# Altium PCB IMX6WBED.PcbDoc (part 1 of 10)
Units mil, origin at the board's own origin, x right, y up, seen from the top; angles counter-clockwise.
Board outline 3318.23 x 4815.16 mil, 6 copper layers (Top Layer, L2_GND_1, L3_INT_1, L6_INT_2, L7_PWR_2, Bottom Layer), stack 27.7 mil thick; 504 components, 400 nets, 2357 pads, 1199 vias.
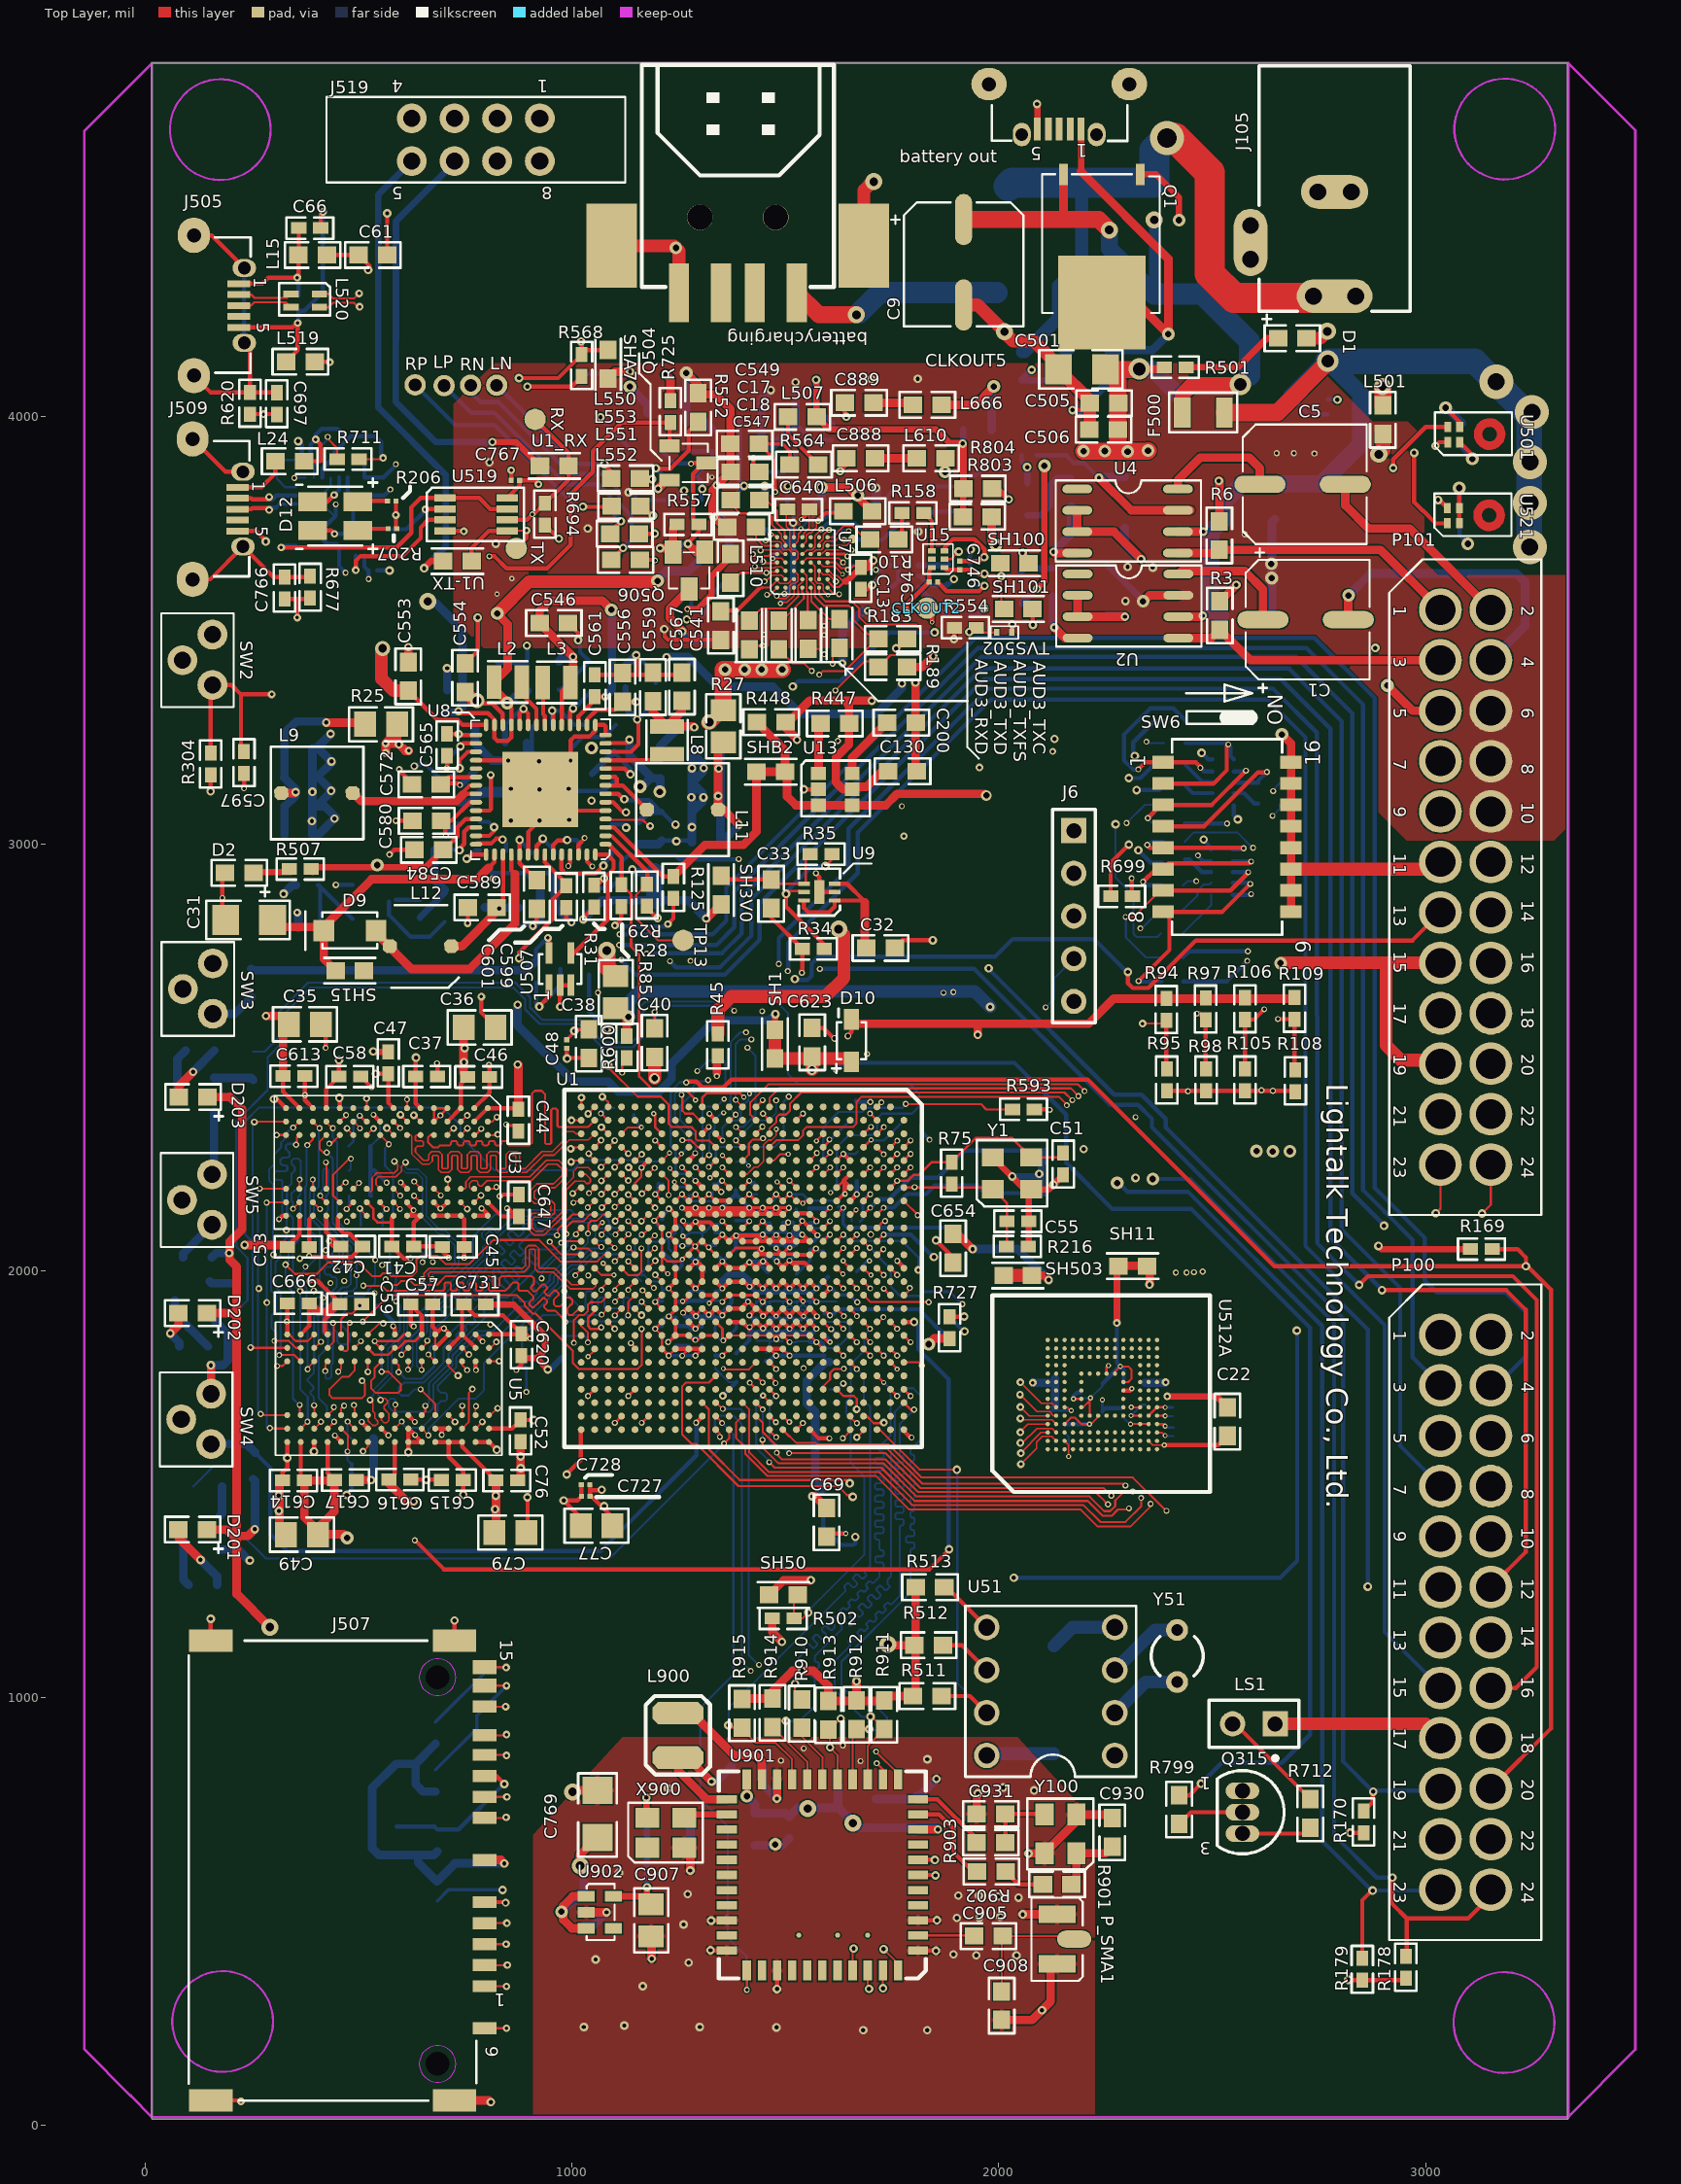
[diagram p0: Top Layer view]
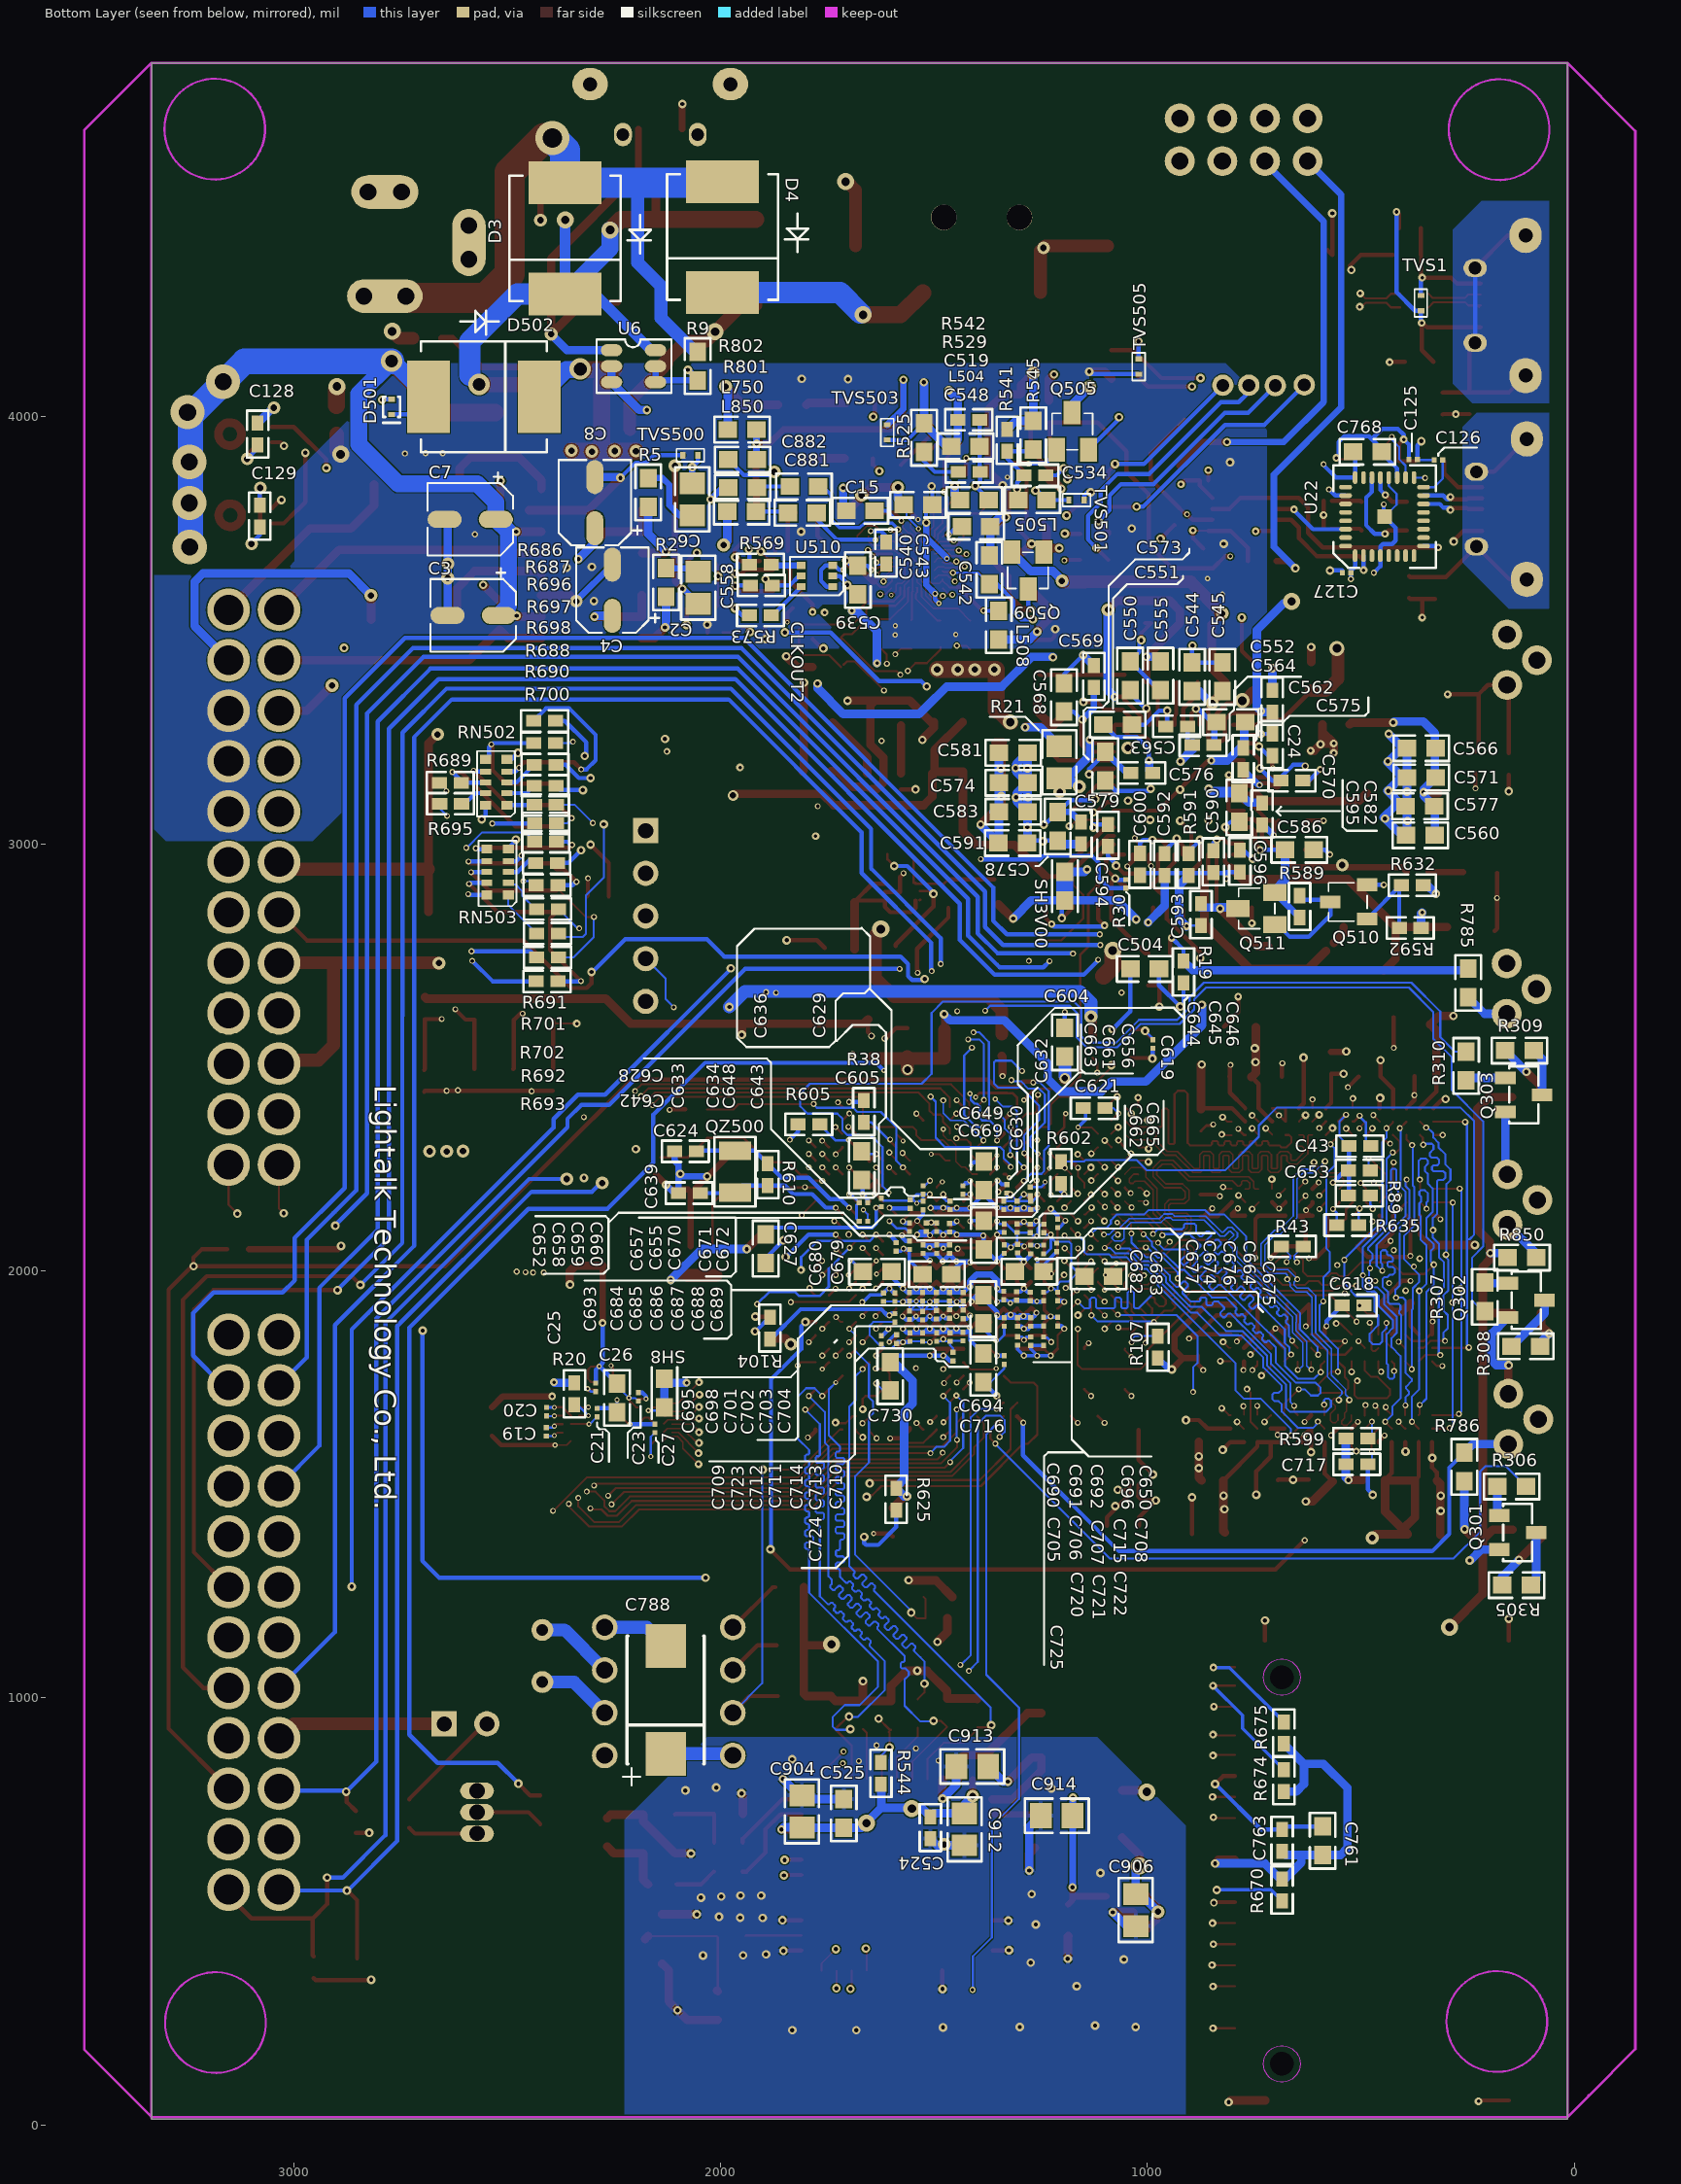
[diagram p1: Bottom Layer view, seen from below]
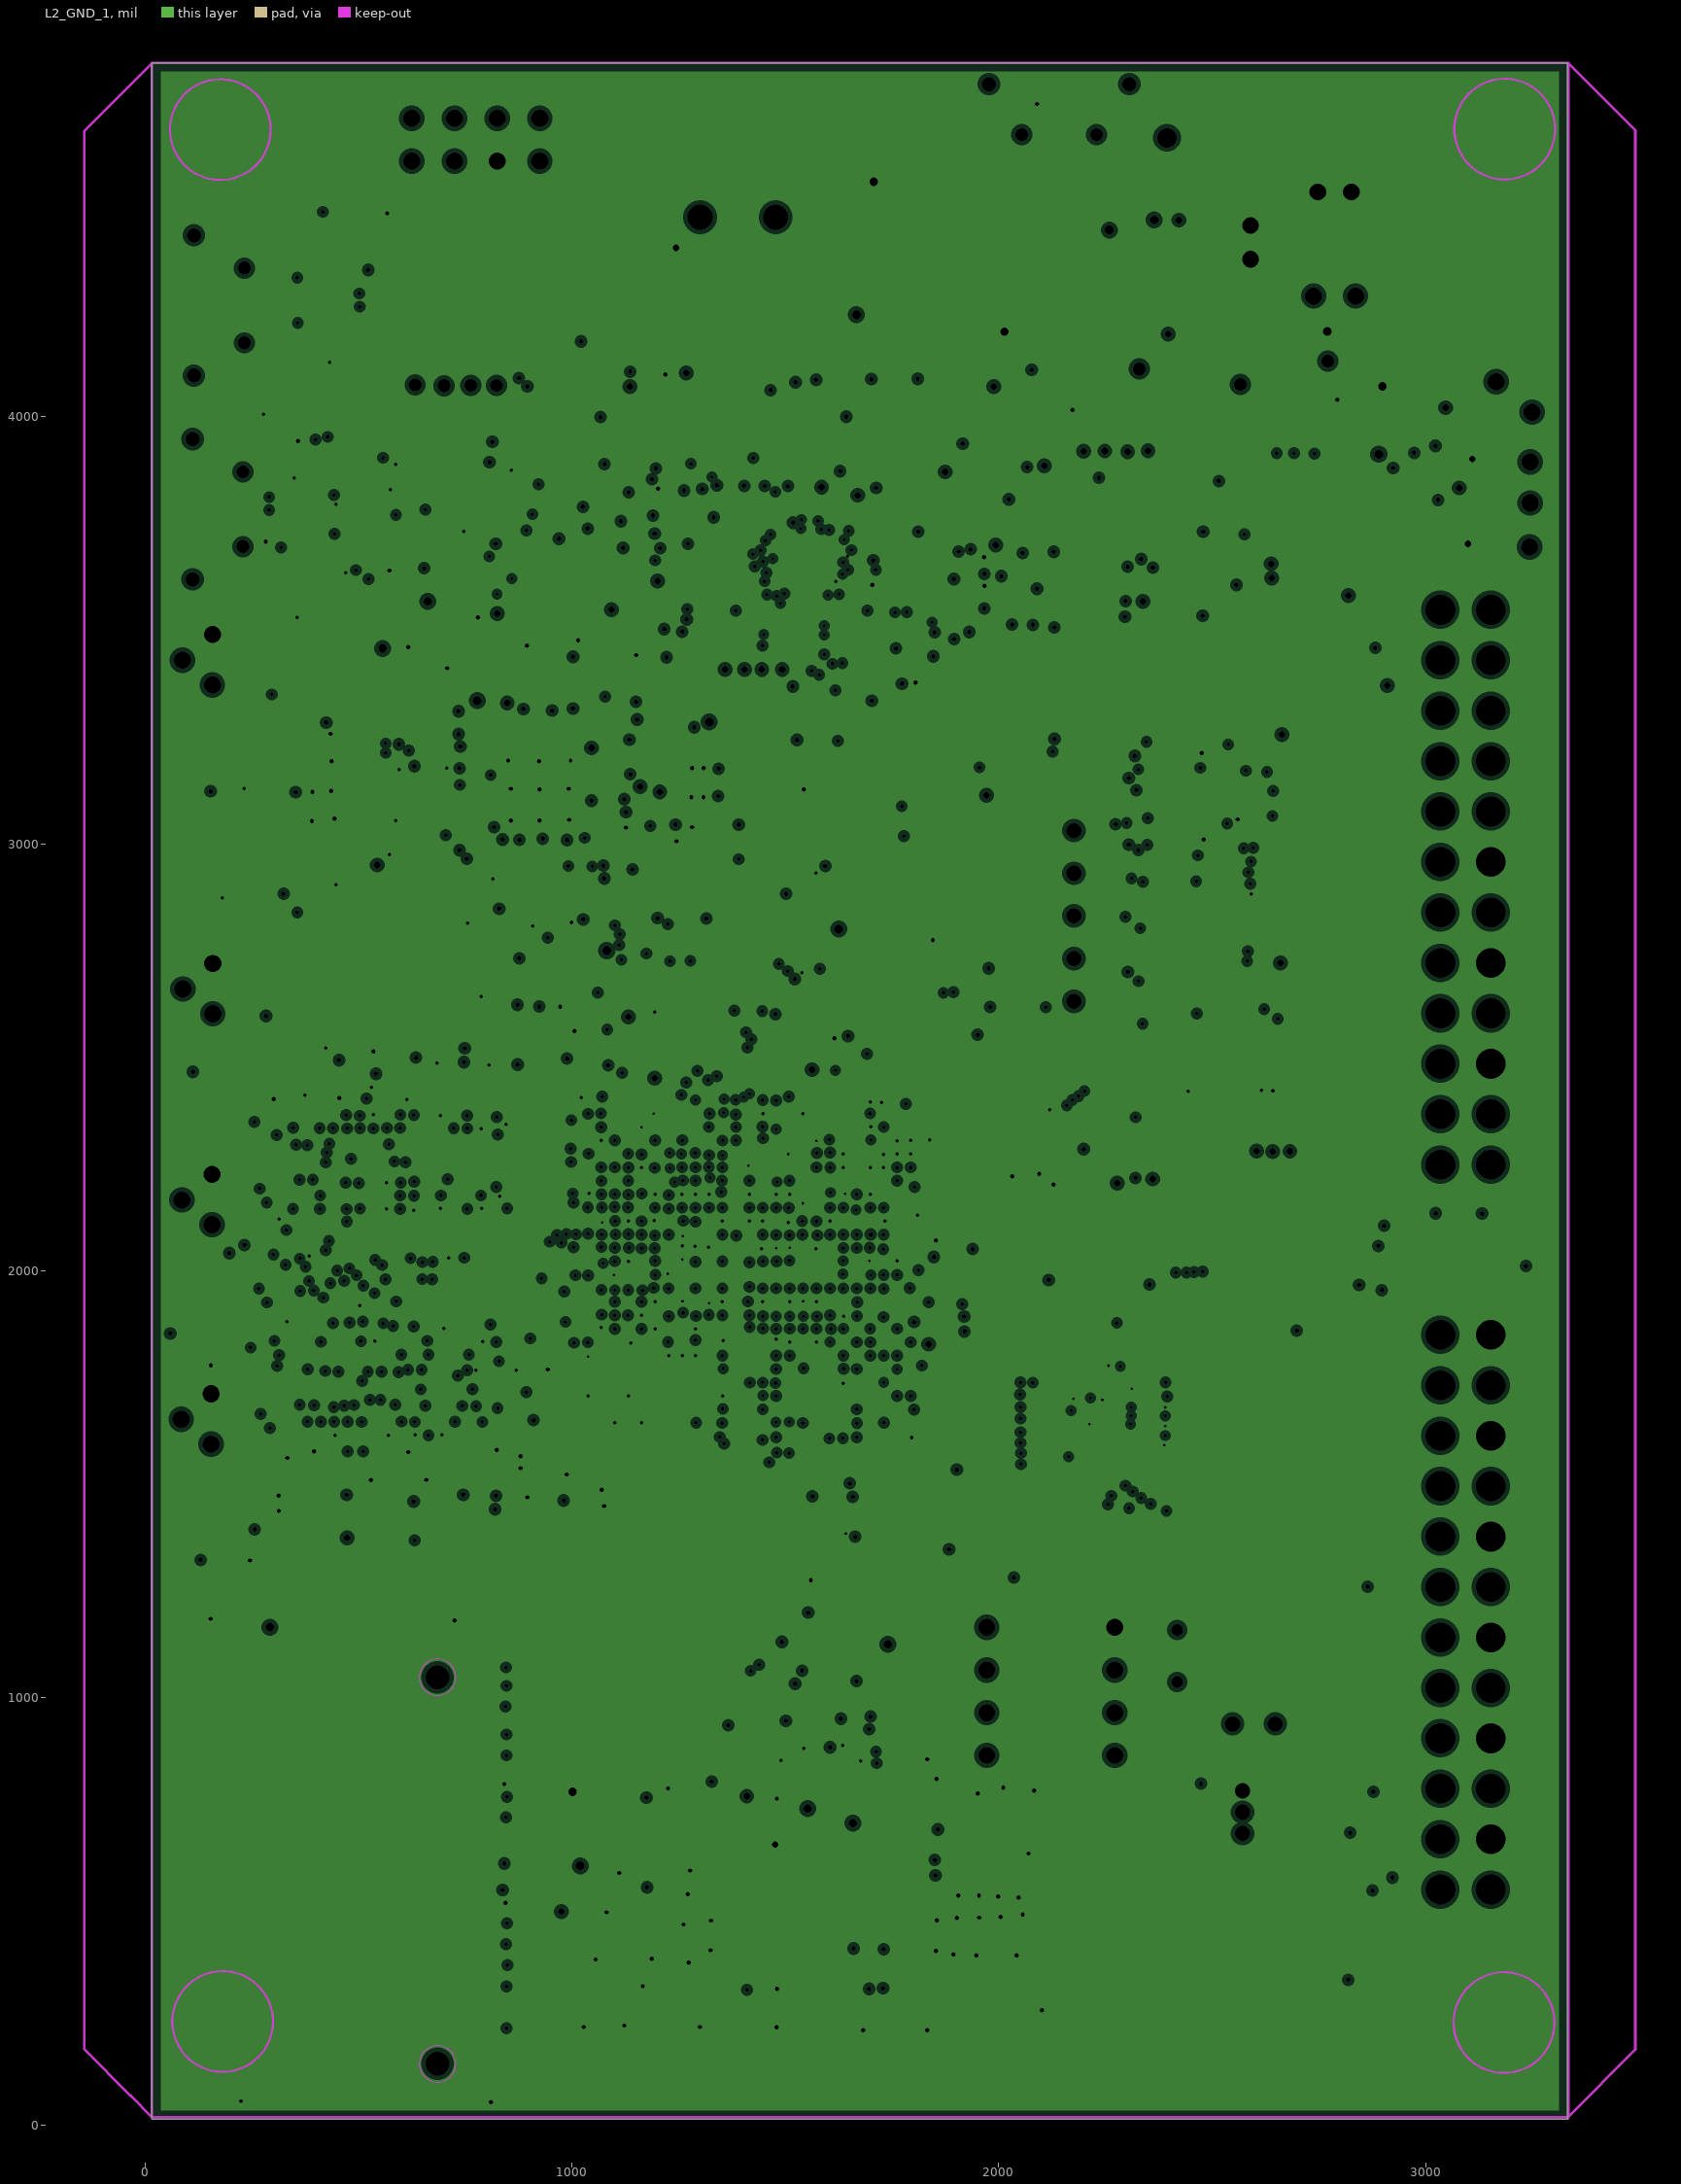
[diagram p2: L2_GND_1, clearances drawn from the general rule]
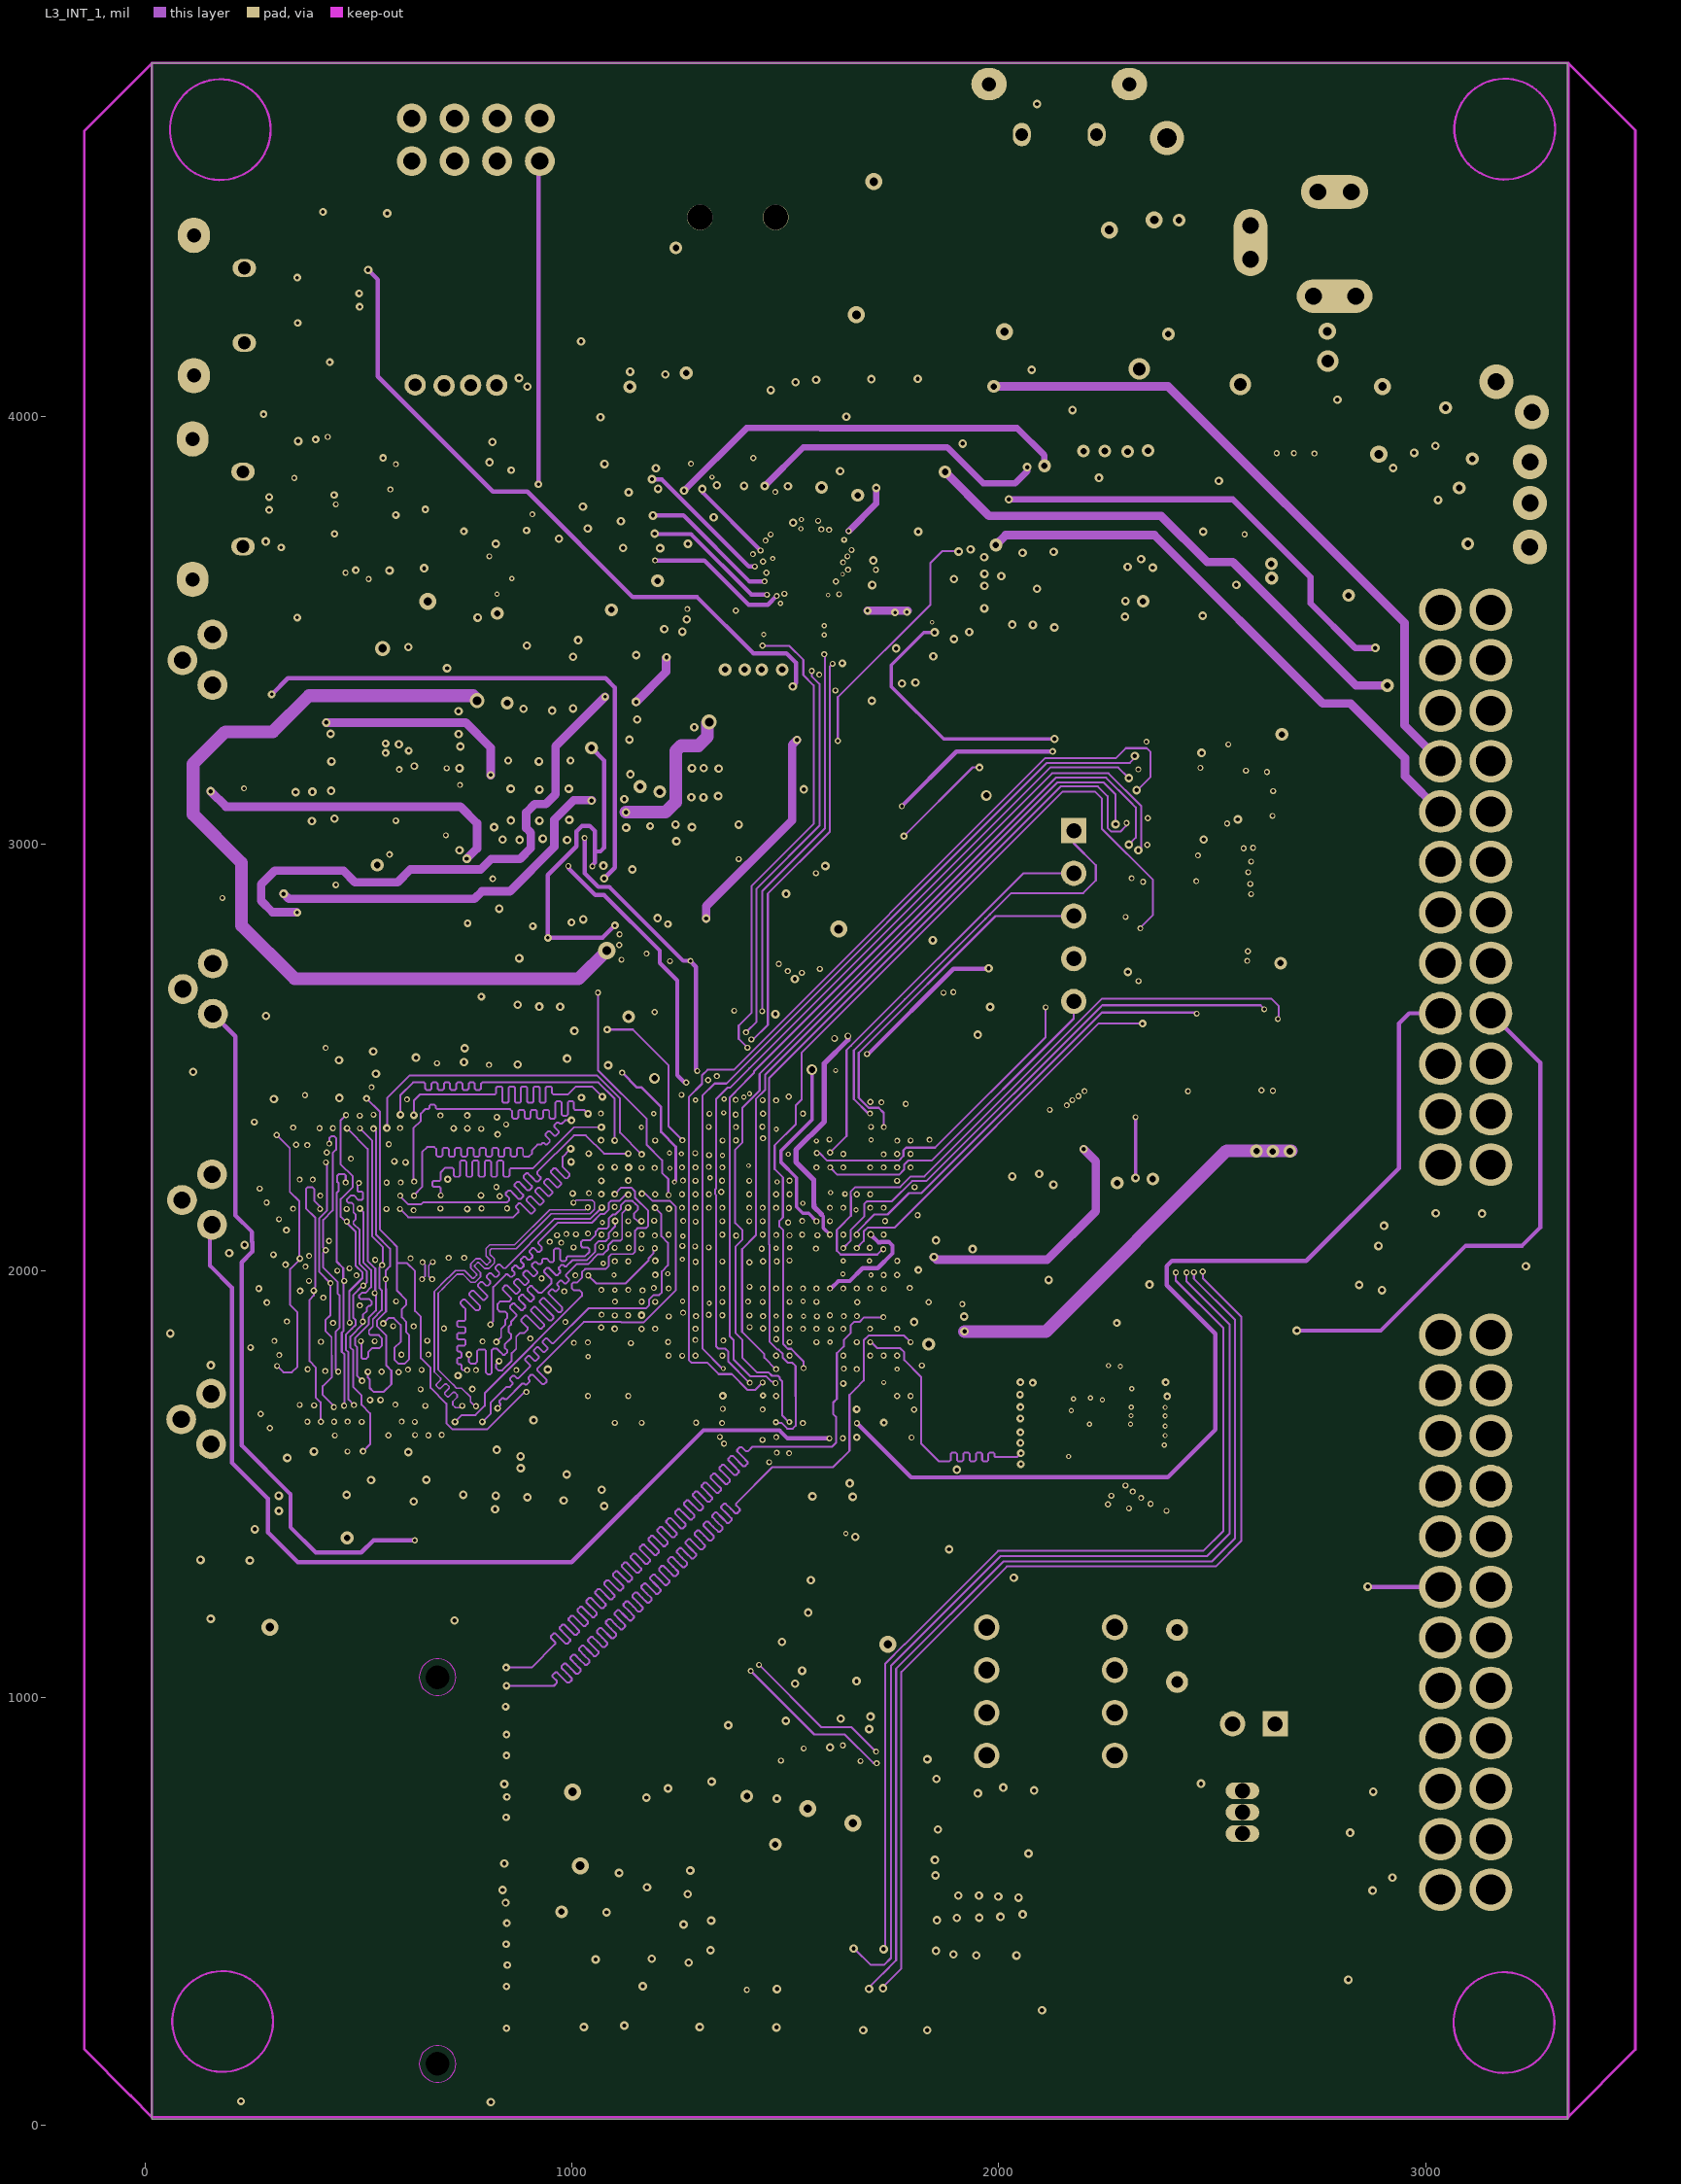
[diagram p3: L3_INT_1]
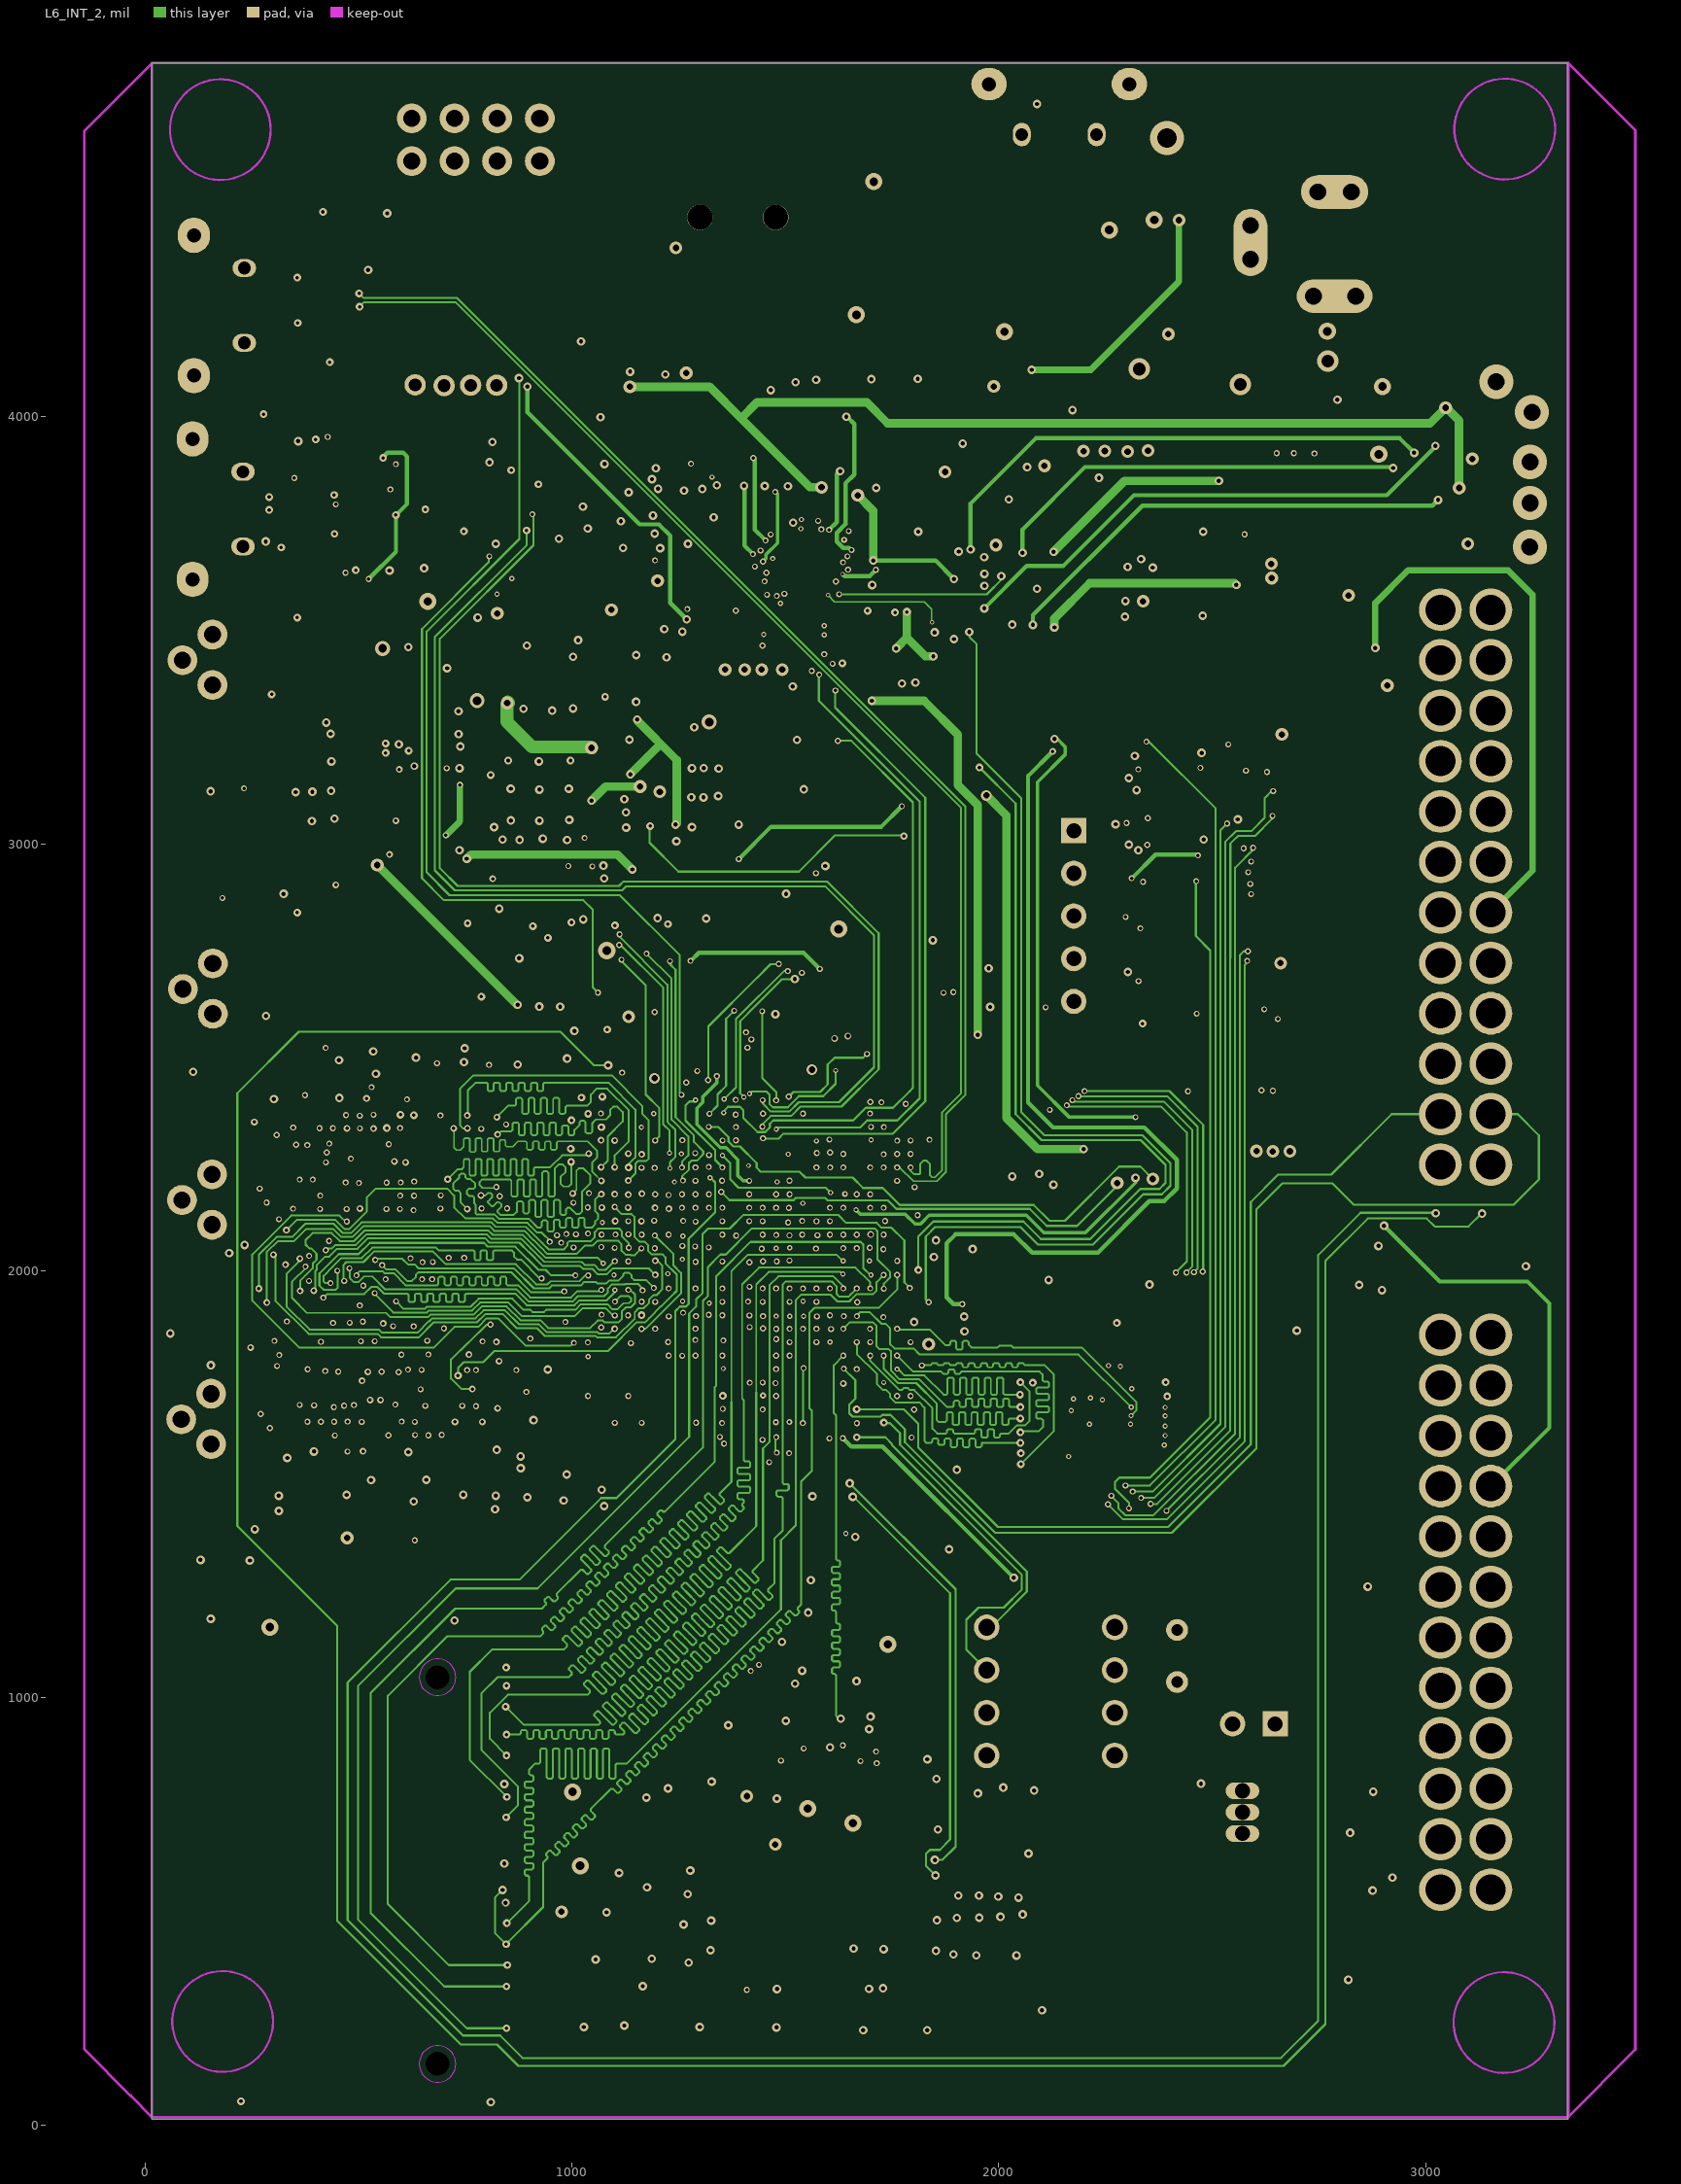
[diagram p4: L6_INT_2]
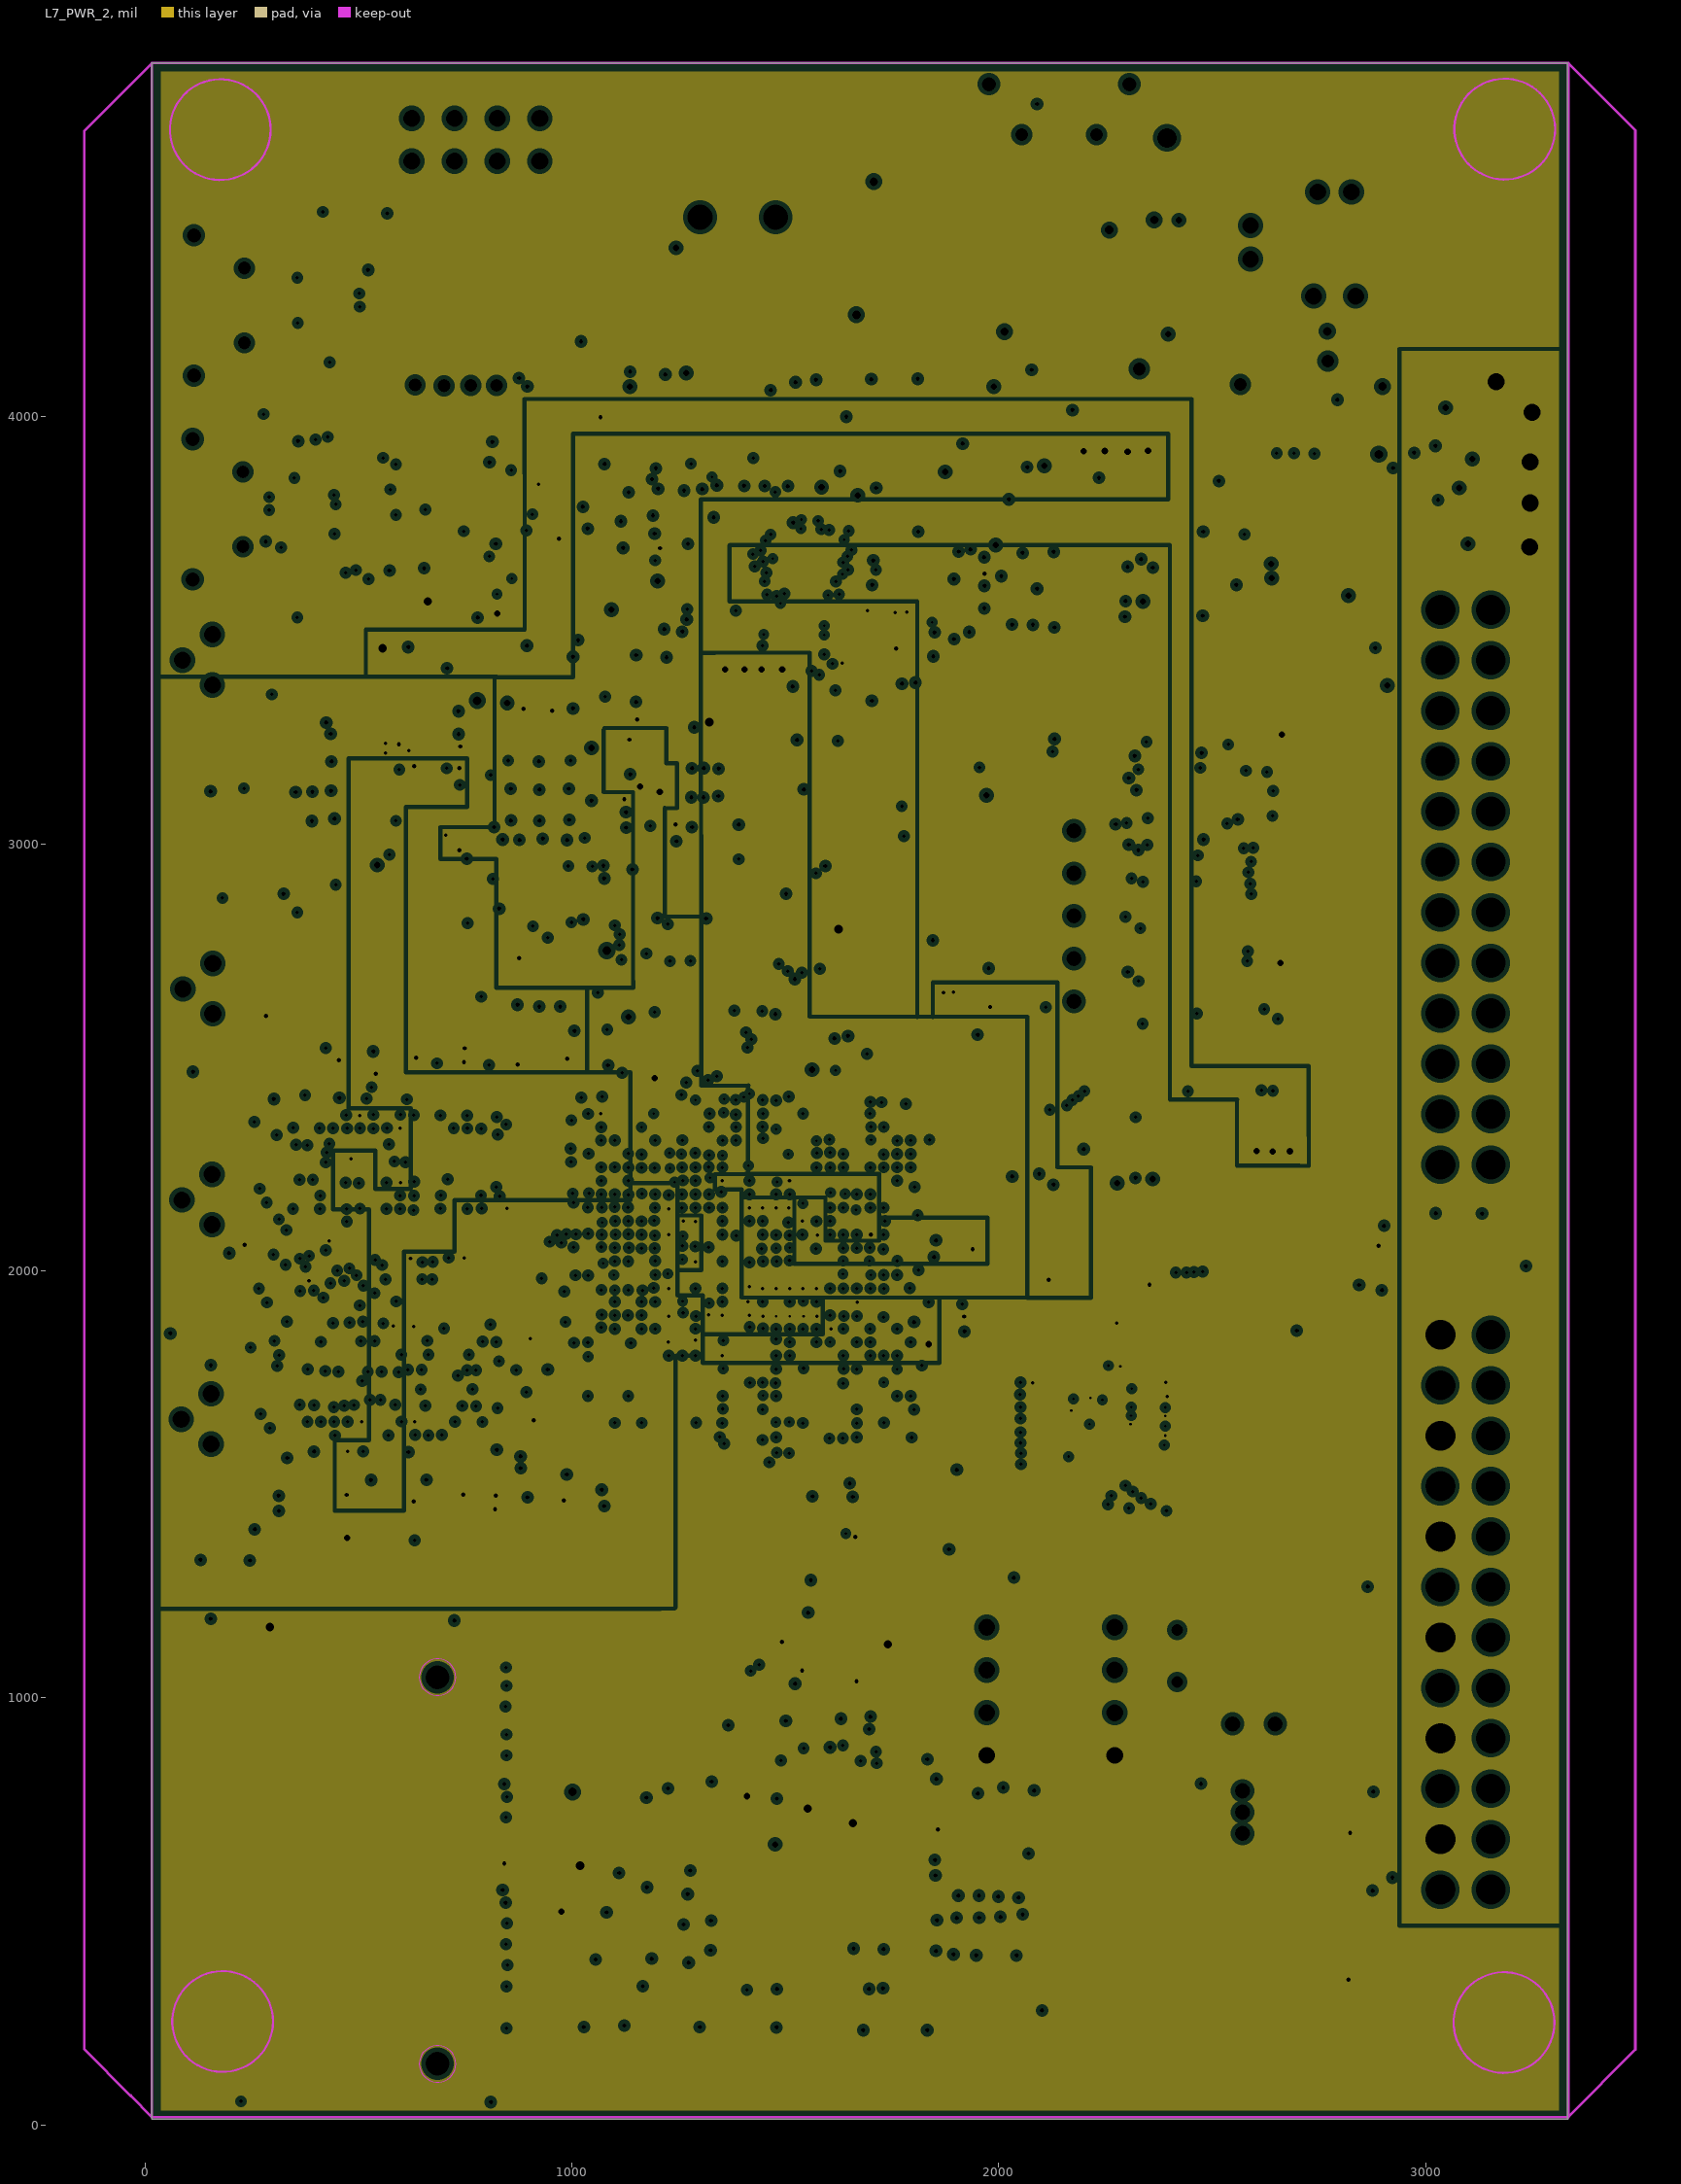
[diagram p5: L7_PWR_2, clearances drawn from the general rule]

## Layer stack, top to bottom
Top Layer: signal copper 1.4
Dielectric: core 2.9, FR-4, Dk 4.8
L2_GND_1: plane copper 1.4, net GND
Dielectric: prepreg 4, FR-4, Dk 4.8
L3_INT_1: signal copper 1.4
Dielectric: core 5.5, FR-4, Dk 4.8
L6_INT_2: signal copper 1.4
Dielectric: prepreg 4, FR-4, Dk 4.8
L7_PWR_2: plane copper 1.4, net (Multiple Nets)
Dielectric: core 2.9, FR-4, Dk 4.8
Bottom Layer: signal copper 1.4

## Board outline
15.34,4828.42 3332.7,4828.42 3332.72,4828.4 3332.72,14.11 3333.57,13.26 16.33,13.26 16.12,13.47 16.12,4827.83 16.1,4827.85

## Design rules (kind name [scope] priority, off if disabled: settings)
Clearance Clearance_21 [InNet('SD4_DATA7')] p1: gap=4.5
Clearance Clearance_20 [InNet('SD4_DATA6')] p2: gap=4.5
Clearance Clearance_19 [InNet('SD4_DATA5')] p3: gap=4.5
Clearance Clearance_18 [InNet('SD4_DATA4')] p4: gap=4.5
Clearance Clearance_17 [InNet('SD4_DATA3')] p5: gap=4.5
Clearance Clearance_16 [InNet('SD4_DATA1')] p6: gap=4.5
Clearance Clearance_15 [InNet('SD4_DATA1')] p7: gap=4.5
Clearance Clearance_14 [InNet('SD4_DATA0')] p8: gap=4.5
Clearance Clearance_13 [InNet('DRAM_DQM6')] p9: gap=4.7
Clearance Clearance_12 [InNet('DRAM_DQM5')] p10: gap=4.7
Clearance Clearance_11 [InNet('DRAM_DQM4')] p11: gap=4.7
Clearance Clearance_10 [InNet('DRAM_DQM3')] p12: gap=4.7
Clearance Clearance_9 [InNet('DRAM_DQM2')] p13: gap=4.7
Clearance Clearance_8 [InNet('DRAM_DQM1')] p14: gap=4.7
Clearance Clearance_7 [InNet('DRAM_DQM0')] p15: gap=4.7
Clearance Clearance_6 [InNetClass('DRAM_D[0..63]')] p16: gap=4.5
Clearance Clearance_5 [InNet('DRAM_SDODT0')] p17: gap=4.7
Clearance Clearance_4 [InNet('DRAM_CS0_B')] p18: gap=4.7
Clearance Clearance_3 [InNet('DRAM_SDCKE0')] p19: gap=4.7
Clearance Clearance_2 [InNet('DRAM_SDBA0')] p20: gap=4.7
Clearance Clearance_1 [InNetClass('DRAM_A[0..15]')] p21: gap=4.7
Clearance [All] p22: gap=3
ComponentClearance [All] p1 off: gap=10 collisioncheckmode=3 verticalgap=10 showdistances=FALSE
DiffPairsRouting DiffPairsRouting_2 [InNet('NetJ505_3')] p1: maxlimit=6 minlimit=1 mostfreqgap=5 midlayer1_maxgap=5 midlayer2_maxgap=5 bottomlayer_maxgap=5 maxuncoupledlength=500
DiffPairsRouting DiffPairsRouting_1 [InNet('NetJ505_2')] p2: maxlimit=5 minlimit=1 mostfreqgap=5 maxuncoupledlength=500
DiffPairsRouting [All] p3: maxlimit=100 minlimit=1 mostfreqgap=5.3 midlayer1_prefgap=5.2 midlayer2_prefgap=5.2 maxuncoupledlength=500
FanoutControl Fanout_LCC [IsLCC] p1: bgadir=Out bgaviamode=Centered fanoutstyle=Auto fanoutdirection=Alternating viagrid=1 // Fanout_LCC (Default Rule)
FanoutControl Fanout_SOIC [IsSOIC] p2: bgadir=Out bgaviamode=Centered fanoutstyle=Auto fanoutdirection=Alternating viagrid=1 // Fanout_SOIC (Default Rule)
FanoutControl Fanout_Small [(CompPinCount < 5)] p3: bgadir=Out bgaviamode=Centered fanoutstyle=Auto fanoutdirection=OutThenIn viagrid=1 // Fanout_Small (Default Rule)
FanoutControl Fanout_Default [All] p4: bgadir=Out bgaviamode=Centered fanoutstyle=Auto fanoutdirection=Alternating viagrid=1 // Fanout_Default (Default Rule)
HoleSize [All] p1 off: absolutevalues=TRUE maxlimit=100 minlimit=1 maxpercent=80.000 minpercent=20.000
HoleToHoleClearance [All] p1 off: gap=20 allowstackedmicrovias=TRUE
LayerPairs [All] p1 off: enforce=TRUE
Length "InNet('DRAM_A13') Or InNet('NetL11_2')" [InNet('DRAM_A13') Or InNet('NetL11_2')] p1 off: maxlimit=163.86 minlimit=10
MinimumSolderMaskSliver [All] p1 off: minsoldermaskwidth=5
NetAntennae [All] p1 off: netantennaetolerance=0
PlaneClearance PlaneClearance_1 [All] p1: clearance=10
PlaneConnect PlaneConnect_4 [InNet('5V_IN')] p1: planeconnectstyle=Direct reliefexpansion=20 reliefentries=4 reliefconductorwidth=10 reliefairgap=10
PlaneConnect PlaneConnect_3 [InNet('GND_ANALOG')] p2: planeconnectstyle=Direct reliefexpansion=20 reliefentries=4 reliefconductorwidth=10 reliefairgap=10
PlaneConnect PlaneConnect_2 [InNet('No Net') And OnLayer('Top Layer')] p3: planeconnectstyle=Relief reliefexpansion=20 reliefentries=4 reliefconductorwidth=10 reliefairgap=10
PlaneConnect PlaneConnect_1 [InNet('GND_ANALOG')] p4: planeconnectstyle=Direct reliefexpansion=20 reliefentries=4 reliefconductorwidth=10 reliefairgap=10
PlaneConnect [All] p5: planeconnectstyle=Direct reliefexpansion=20 reliefentries=4 reliefconductorwidth=10 reliefairgap=10
PolygonConnect PolygonConnect_3 [InNet('5V_IN')] p1: connectstyle=Direct reliefconductorwidth=10 reliefentries=4 polygonreliefangle="90 Angle"
PolygonConnect PolygonConnect_2 [InNet('GND_ANALOG')] p2: connectstyle=Direct reliefconductorwidth=10 reliefentries=4 polygonreliefangle="90 Angle"
PolygonConnect PolygonConnect_1 [InNet('No Net') And OnLayer('Top Layer')] p3: connectstyle=Relief reliefconductorwidth=10 reliefentries=4 polygonreliefangle="90 Angle"
PolygonConnect [InNet('GND_ANALOG')] p4: connectstyle=Direct reliefconductorwidth=10 reliefentries=4 polygonreliefangle="90 Angle"
RoutingVias [All] p1: holewidth=20 width=20 viastyle="Through Hole" minholewidth=1 minwidth=1 maxholewidth=28 maxwidth=50
SilkToSilkClearance [All] p1 off: silktosilkclearance=1
SilkscreenOverComponentPads [All] p1 off: minsilkscreentomaskgap=10
SolderMaskExpansion [All] p1: expansion=4
Width [All] p1: maxlimit=100 minlimit=1 preferedwidth=3.7
12 further rules are at their usual default settings.

## Classes and differential pairs
net class DRAM_D[0..31]: DRAM_D0 DRAM_D1 DRAM_D2 DRAM_D3 DRAM_D4 DRAM_D5 DRAM_D6 DRAM_D7 DRAM_D8 DRAM_D9 DRAM_D10 DRAM_D11 DRAM_D12 DRAM_D13 DRAM_D14 DRAM_D15 DRAM_D16 DRAM_D17 DRAM_D18 DRAM_D19 DRAM_D20 DRAM_D21 DRAM_D22 DRAM_D23 DRAM_D24 DRAM_D25 DRAM_D26 DRAM_D27 DRAM_D28 DRAM_D29 DRAM_D30 DRAM_D31 DRAM_D32 DRAM_D33 DRAM_D34 DRAM_D35 DRAM_D36 DRAM_D37 DRAM_D38 DRAM_D39 DRAM_D40 DRAM_D41 DRAM_D42 DRAM_D43 DRAM_D44 DRAM_D45 DRAM_D46 DRAM_D47 DRAM_D48 DRAM_D49 DRAM_D50 DRAM_D51 DRAM_D52 DRAM_D53 DRAM_D54 DRAM_D55 DRAM_D56 DRAM_D57 DRAM_D58 DRAM_D59 DRAM_D60 DRAM_D61 DRAM_D62 DRAM_D63
component class DDR3: C35 C36 C37 C38 C41 C42 C43 C44 C45 C46 C47 C48 C49 C52 C53 C57 C58 C59 C76 C77 C79 C613 C614 C615 C616 C617 C618 C619 C620 C621 C647 C650 C653 C662 C664 C665 C666 C675 C683 C696 C708 C715 C717 C720 C721 C722 C727 C728 C731 R43 R89 R107 R599 R602 R635 U3 U5
component class IMX6DL_control: C51 C55 C624 C632 C639 QZ500 R38 R75 R216 R600 R605 R610 R786 SW4 Y1
net class DRAM_A[0..15]: DRAM_A0 DRAM_A1 DRAM_A2 DRAM_A3 DRAM_A4 DRAM_A5 DRAM_A6 DRAM_A7 DRAM_A8 DRAM_A9 DRAM_A10 DRAM_A11 DRAM_A12 DRAM_A13 DRAM_A14 DRAM_A15
component class "UART to USB - OTG to USB": C61 C66 C125 C126 C127 C697 C766 C767 C768 D12 J6 J505 J509 J519 J601 L15 L24 L519 L520 R206 R207 R593 R620 R677 R694 R711 RX TVS1 TX U1-TX U1_RX U22 U519
component class POWER: "battery out" batterycharging C9 C24 C31 C32 C33 C130 C200 C501 C505 C506 C544 C545 C546 C550 C551 C552 C553 C554 C555 C556 C559 C560 C561 C562 C563 C564 C565 C566 C567 C568 C569 C570 C571 C572 C573 C574 C575 C576 C577 C578 C579 C580 C581 C582 C583 C584 C586 C589 C590 C591 C592 C593 C594 C595 C596 C597 C599 C600 C601 D1 D2 D3 D4 D9 D501 D502 F500 J4 J105 J_POWR1 L2 L3 L8 L9 L11 L12 Q1 Q510 Q511 R9 R21 R25 R27 R28 R29 R30 R31 R34 R35 R125 R304 R447 R448 R501 R507 R589 R591 R592 R632 SH3V00 SH3V0 SH9 SH15 SHB2 SW2 TP13 U6 U8 U9 U13
component class IMX6DL: D201 D202 D203 LS1 P100 P101 Q301 Q302 Q303 Q315 R169 R170 R178 R179 R305 R306 R307 R308 R309 R310 R712 R785 R799 SW3
component class IMX6DL_POWER: C40 C69 C604 C605 C623 C628 C629 C630 C634 C636 C643 C644 C645 C646 C648 C649 C652 C654 C655 C656 C657 C658 C659 C660 C661 C663 C669 C670 C671 C672 C674 C676 C677 C679 C680 C682 C684 C685 C686 C687 C688 C689 C690 C691 C692 C693 C694 C695 C698 C701 C702 C703 C704 C705 C706 C707 C709 C710 C711 C712 C713 C714 C716 C723 C724 C725 C730 D10 R45 R85 R104 R625 R727 SH1 SH16 SH503 U1
component class "EMMC_SD card": C19 C20 C21 C22 C23 C25 C26 C27 C524 C525 C627 C633 C642 C761 C763 C769 J507 R20 R502 R544 R670 R674 R675 SH8 SH11 SH50 U512A
component class AUDIO: AUD3_RXD AUD3_TXC AUD3_TXD AUD3_TXFS C13 C15 C17 C18 C94 C128 C129 C519 C534 C539 C540 C541 C542 C543 C547 C548 C549 C558 C640 C746 C881 C882 C888 C889 CLKOUT2 CLKOUT5 L501 L504 L505 L506 L507 L508 L510 L550 L551 L552 L553 L610 L666 L750 L850 LN LP P200 Q504 Q505 Q506 Q509 R10 R158 R183 R189 R525 R529 R541 R542 R545 R552 R554 R557 R564 R568 R569 R573 R725 R801 R802 R803 R804 RN RP SH100 SH101 SHA7 TVS500 TVS501 TVS502 TVS503 TVS505 U7 U15 U501 U510 U521
component class BOOT_SET: C504 C788 R19 R94 R95 R97 R98 R105 R106 R108 R109 R511 R512 R513 R686 R687 R688 R689 R690 R691 R692 R693 R695 R696 R697 R698 R699 R700 R701 R702 R850 RN502 RN503 SW5 SW6 U51 U507 Y51
component class "POWER Amplifier": C1 C2 C3 C4 C5 C6 C7 C8 R2 R3 R5 R6 U2 U4
component class AP6212WIFI: C904 C905 C906 C907 C908 C912 C913 C914 C930 C931 L900 P_SMA1 R901 R902 R903 R910 R911 R912 R913 R914 R915 U901 U902 X900 Y100

## Components (designator, comment, footprint, x,y, rotation, side; value= is the part's Value field where it differs from the comment)
AUD3_RXD "SHORT" SHORT_SH 1415.47,3488.9 r90 top
AUD3_TXC "SHORT" SHORT_SH 1626.47,3492.9 r90 top
AUD3_TXD "SHORT" SHORT_SH 1484.47,3488.9 r90 top
AUD3_TXFS "SHORT" SHORT_SH 1553.47,3489.9 r90 top
"battery out" "USB AB 5 MICRO" micro-USB-port 2192.47,4673.9 r180 top
batterycharging "USB_A batterycharging" USB_A 1388.47,4378.9 r180 top
C1 "6.3X7.7" "SMD Electrolytic Capacitors 6.3 X 7.7" 2818.47,3524.9 r180 top
C2 "0805" 0805 2052.47,3599.9 r270 bottom
C3 "4x5.3" "SMD Electrolytic Capacitors 4X 5.3" 2639.47,3534.9 r180 bottom
C4 "4x5.3" "SMD Electrolytic Capacitors 4X 5.3" 2253.47,3653.9 r270 bottom
C5 "6.3x7.7" "SMD Electrolytic Capacitors 6.3 X 7.7" 2811.47,3841.9 r180 top
C6 "0805" 0805 2066.47,3806.9 r90 bottom
C7 "4x5.3" "SMD Electrolytic Capacitors 4X 5.3" 2646.47,3759.9 r180 bottom
C8 "4x5.3" "SMD Electrolytic Capacitors 4X 5.3" 2294.47,3858.9 r270 bottom
C9 "6.3*7.7" "SMD Electrolytic Capacitors 6.3 X 7.7" 1917.47,4261.9 r90 top
C13 "16V" 0402 1676.47,3621.9 r90 top
C15 "6.3V" 0603 1672.47,3779.9 r180 bottom
C17 "6.3V" 0603 1405.47,3870.9 r0 top
C18 "16V" 0603 1405.47,3804.9 r0 top
C19 "6.3V" 0201 2408.47,1632.9 r270 bottom
C20 "6.3V" 0201 2407.47,1679.9 r270 bottom
C21 "6.3V" 0201 2289.47,1677.9 r270 bottom
C22 "6.3V" 0603 2535.47,1646.9 r90 top
C23 "6.3V" 0201 2192.47,1714.9 r270 bottom
C24 "16V" 0402 707.47,3231.9 r270 bottom
C25 "6.3V" 0201 2292.47,1716.9 r90 bottom
C26 "6.3V" 0603 2242.47,1701.9 r90 bottom
C27 "6.3V" 0201 2153.84,1640.95 r270 bottom
C31 "10V" NONPOLARITY_CAP_1206 243.47,2821.9 r0 top
C32 "10V" 0603 1722.47,2755.9 r0 top
C33 "10V" 0603 1466.47,2882.9 r90 top
C35 "6.3V" 0805 374.47,2576.9 r180 top
C36 "6.3V" 0805 783.47,2569.9 r180 top
C37 "16V" 0402 659.47,2454.9 r180 top
C38 "4V" 0603 1039.47,2531.9 r270 top
C40 "4V" 0603 1193.47,2533.9 r270 top
C41 "16V" 0402 603.47,2056.9 r180 top
C42 "16V" 0402 483.47,2056.9 r180 top
C43 "16V" 0402 502.47,2291.9 r180 bottom
C44 "16V" 0402 874.47,2352.9 r90 top
C45 "16V" 0402 721.47,2055.9 r0 top
C46 "16V" 0402 781.47,2453.9 r180 top
C47 "16V" 0402 569.47,2486.9 r270 top
C48 "6.3V" 0201 987.47,2540.9 r270 top
C49 "6.3V" 0805 367.47,1381.9 r0 top
C51 "Cap" 0402 2150.47,2249.9 r90 top
C52 "16V" 0402 879.47,1624.9 r90 top
C53 "16V" 0402 358.47,2055.9 r180 top
C55 "Cap" 0402 2044.47,2115.9 r180 top
C57 "16V" 0402 647.47,1920.9 r180 top
C58 "16V" 0402 479.47,2454.9 r180 top
C59 "16V" 0402 481.47,1921.9 r180 top
C61 "10V" 0603 533.47,4378.9 r180 top
C66 "16V" 0402 385.47,4441.9 r180 top
C69 "6.3V" 0603 1596.47,1410.9 r270 top
C76 "16V" 0402 847.47,1508.9 r180 top
C77 "6.3V" 0805 1057.47,1402.9 r180 top
C79 "6.3V" 0805 855.47,1386.9 r180 top
C94 "6.3V" 0201 1836.47,3612.9 r0 top
C125 "10V" 0201 367.47,3899.9 r0 bottom
C126 "6.3V" 0201 308.47,3898.9 r0 bottom
C127 "10V" 0201 543.47,3634.9 r180 bottom
C128 "Cap" 0402 3084.59,3959.43 r90 bottom
C129 "Cap" 0402 3079.59,3767.43 r90 bottom
C130 "Cap" 0603 1774.47,3169.9 r180 top
C200 "Cap" 0603 1771.47,3283.9 r0 top
C501 "10V" nonpolarity_cap_1206 2194.47,4110.9 r0 top
C504 "16V" 0603 1006.47,2706.9 r180 bottom
C505 "6.3V" 0603 2246.47,4031.9 r0 top
C506 "16V" 0603 2245.47,3969.9 r0 top
C519 "16V" 0402 1417.47,3870.9 r180 bottom
C524 "16V" 0402 1508.47,695.9 r270 bottom
C525 "6.3V" 0603 1711.47,728.9 r90 bottom
C534 "16V" 0402 1263.47,3862.9 r0 bottom
C539 "6.3V" 0603 1678.47,3617.9 r90 bottom
C540 "16V" 0402 1612.47,3680.9 r270 bottom
C541 "16V" 0603 1348.47,3510.9 r90 top
C542 "6.3V" 0603 1370.47,3641.9 r270 bottom
C543 "16V" 0603 1537.47,3793.9 r0 bottom
C544 "6.3V" 0603 895.47,3390.9 r270 bottom
C545 "6.3V" 0603 824.47,3390.9 r270 bottom
C546 "6.3V" 0603 957.47,3516.9 r0 top
C547 "16V" 0603 1397.47,3741.9 r180 top
C548 "16V" 0603 1401.47,3742.9 r180 bottom
C549 "16V" 0603 1404.47,3936.9 r0 top
C550 "10V" 0603 1040.47,3393.9 r270 bottom
C551 "10V" 0603 1069.47,3278.9 r0 bottom
C552 "10V" 0603 804.47,3284.9 r0 bottom
C553 "10V" 0603 616.47,3391.9 r270 top
C554 "10V" 0603 749.47,3388.9 r270 top
C555 "6.3V" 0603 969.47,3393.9 r270 bottom
C556 "10V" 0603 1118.47,3365.9 r90 top
C558 "Cap" 0402 1904.47,3604.9 r0 bottom
C559 "6.3V" 0603 1189.47,3366.9 r270 top
C560 "6.3V" 0603 360.47,3019.9 r180 bottom
C561 "16V" 0402 1053.47,3369.9 r90 top
C562 "16V" 0402 707.47,3333.9 r90 bottom
C563 "16V" 0402 931.47,3274.9 r0 bottom
C564 "16V" 0402 869.47,3230.9 r180 bottom
C565 "16V" 0402 707.47,3231.9 r90 top
C566 "6.3V" 0603 358.47,3223.9 r180 bottom
C567 "6.3V" 0603 1257.47,3367.9 r270 top
C568 "10V" 0603 1195.47,3342.9 r270 bottom
C569 "16V" 0402 1125.47,3391.9 r270 bottom
C570 "10V" 0402 661.47,3147.9 r0 bottom
C571 "6.3V" 0603 358.47,3154.9 r180 bottom
C572 "10V" 0603 658.47,3138.9 r180 top
C573 "10V" 0603 1098.95,3181.84 r90 bottom
C574 "6.3V" 0603 1314.47,3142.9 r0 bottom
C575 "16V" 0402 775.47,3198.9 r270 bottom
C576 "16V" 0402 1013.47,3165.9 r0 bottom
C577 "6.3V" 0603 361.47,3087.9 r180 bottom
C578 "10V" 0603 1210.47,3040.9 r90 bottom
C579 "16V" 0402 1155.47,3024.9 r90 bottom
C580 "10V" 0603 659.47,3053.9 r180 top
C581 "6.3V" 0603 1314.47,3212.9 r0 bottom
C582 "16V" 0402 731.47,3069.9 r270 bottom
C583 "6.3V" 0603 1314.47,3074.9 r0 bottom
C584 "10V" 0603 664.47,2985.9 r0 top
C586 "16V" 0603 644.47,2985.9 r0 bottom
C589 "10V" 0603 789.47,2850.9 r180 top
C590 "16V" 0402 845.47,2957.9 r90 bottom
C591 "6.3V" 0603 1315.47,3001.9 r0 bottom
C592 "10V" 0402 959.47,2950.9 r270 bottom
C593 "16V" 0402 874.47,2833.9 r270 bottom
C594 "16V" 0402 1092.47,3019.9 r270 bottom
C595 "10V" 0603 784.47,3084.9 r270 bottom
C596 "16V" 0402 783.47,2958.9 r90 bottom
C597 "16V" 0402 231.47,3189.9 r90 top
C599 "10V" 0402 986.47,2875.9 r90 top
C600 "10V" 0402 1017.47,2951.9 r90 bottom
C601 "Cap" 0603 917.47,2880.9 r90 top
C604 "4V" 0603 1193.47,2534.9 r270 bottom
C605 "6.3V" 0603 1669.47,2245.9 r90 bottom
C613 "16V" 0402 348.47,2455.9 r180 top
C614 "16V" 0402 347.47,1508.9 r0 top
C615 "16V" 0402 719.47,1509.9 r0 top
C616 "16V" 0402 596.47,1510.9 r180 top
C617 "16V" 0402 469.47,1509.9 r180 top
C618 "16V" 0402 518.47,1918.9 r0 bottom
C619 "6.3V" 0201 987.47,2540.9 r270 bottom
C620 "16V" 0402 881.47,1826.9 r90 top
C621 "16V" 0402 1124.47,2380.9 r180 bottom
C623 "6.3V" 0603 1562.47,2534.9 r270 top
C624 "Cap" 0402 2082.47,2279.9 r180 bottom
C627 "6.3V" 0603 1894.47,2051.9 r90 bottom
C628 "6.3V" 0201 1675.47,2159.9 r180 bottom
C629 "6.3V" 0201 1432.47,2178.9 r90 bottom
C630 "6.3V" 0201 1329.47,2201.9 r270 bottom
C632 "6.3V" 0201 1274.47,2175.9 r90 bottom
C633 "6.3V" 0201 1623.47,2169.9 r270 bottom
C634 "6.3V" 0201 1555.47,2145.9 r90 bottom
C636 "6.3V" 0201 1525.47,2178.9 r90 bottom
C639 "Cap" 0402 2073.47,2181.9 r180 bottom
C640 "16V" 0402 1530.47,3782.9 r180 top
C642 "10V" 0201 1655.47,2115.9 r0 bottom
C643 "6.3V" 0201 1462.51,2163.43 r270 bottom
C644 "6.3V" 0201 1336.53,2163.43 r270 bottom
C645 "6.3V" 0201 1305.03,2163.43 r270 bottom
C646 "6.3V" 0201 1273.53,2163.43 r270 bottom
C647 "16V" 0402 875.47,2152.9 r270 top
C648 "6.3V" 0201 1525.47,2162.9 r270 bottom
C649 "4V" 0603 1383.47,2221.9 r270 bottom
C650 "6.3V" 0201 1210.47,1929.9 r90 bottom
C652 "6.3V" 0201 1557.47,2091.9 r90 bottom
C653 "16V" 0402 503.47,2234.9 r180 bottom
C654 "4V" 0603 1892.47,2052.9 r270 top
C655 "Cap" 0201 1557.47,2049.9 r90 bottom
C656 "6.3V" 0201 1274.47,2088.9 r90 bottom
C657 "6.3V" 0201 1588.47,2045.9 r90 bottom
C658 "6.3V" 0201 1518.47,2111.9 r270 bottom
C659 "6.3V" 0201 1493.47,2111.9 r270 bottom
C660 "6.3V" 0201 1463.47,2110.9 r270 bottom
C661 "6.3V" 0201 1305.47,2089.9 r90 bottom
C662 "6.3V" 0201 1242.47,2108.9 r270 bottom
C663 "6.3V" 0201 1335.47,2109.9 r270 bottom
C664 "6.3V" 0201 1243.47,2059.9 r270 bottom
C665 "6.3V" 0201 1210.47,2100.9 r90 bottom
C666 "16V" 0402 358.47,1923.9 r0 top
C669 "4V" 0603 1383.47,2083.9 r270 bottom
C670 "6.3V" 0201 1525.47,2060.9 r270 bottom
C671 "6.3V" 0201 1493.47,2060.9 r270 bottom
C672 "6.3V" 0201 1463.47,2060.9 r270 bottom
C674 "6.3V" 0201 1304.47,2061.9 r270 bottom
C675 "6.3V" 0201 1212.47,2044.9 r90 bottom
C676 "6.3V" 0201 1273.47,2059.9 r270 bottom
C677 "6.3V" 0201 1335.47,2060.9 r270 bottom
C679 "4V" 0603 1493.47,1991.9 r180 bottom
C680 "4V" 0603 1633.47,1997.9 r180 bottom locked
C682 "4V" 0603 1276.47,1997.9 r0 bottom
C683 "4V" 0603 1114.47,1986.9 r0 bottom
C684 "6.3V" 0201 1591.47,1927.9 r90 bottom
C685 "6.3V" 0201 1557.47,1928.9 r90 bottom
C686 "6.3V" 0201 1526.47,1928.9 r90 bottom
C687 "6.3V" 0201 1494.47,1928.9 r90 bottom
C688 "6.3V" 0201 1463.47,1928.9 r90 bottom
C689 "6.3V" 0201 1431.47,1928.9 r90 bottom
C690 "6.3V" 0201 1336.47,1931.9 r90 bottom
C691 "6.3V" 0201 1306.47,1930.9 r90 bottom
C692 "6.3V" 0201 1274.47,1929.9 r90 bottom
C693 "6.3V" 0201 1618.47,1927.9 r90 bottom
C694 "4V" 0603 1384.47,1909.9 r90 bottom
C695 "6.3V" 0201 1591.47,1879.9 r90 bottom
C696 "6.3V" 0201 1243.47,1929.9 r90 bottom
C697 "16V" 0402 308.47,4030.9 r90 top
C698 "6.3V" 0201 1557.47,1905.9 r270 bottom
C701 "6.3V" 0201 1526.47,1904.9 r270 bottom
C702 "6.3V" 0201 1494.47,1906.9 r270 bottom
C703 "6.3V" 0201 1463.47,1908.9 r270 bottom
C704 "6.3V" 0201 1431.47,1907.9 r270 bottom
C705 "6.3V" 0201 1335.47,1869.9 r90 bottom
C706 "6.3V" 0201 1304.47,1869.9 r90 bottom
C707 "6.3V" 0201 1273.47,1869.9 r90 bottom
C708 "6.3V" 0201 1210.47,1870.9 r90 bottom
C709 "6.3V" 0201 1623.47,1827.9 r90 bottom
C710 "6.3V" 0201 1432.47,1835.9 r90 bottom
C711 "6.3V" 0201 1526.47,1834.9 r90 bottom
C712 "6.3V" 0201 1556.47,1834.9 r90 bottom
C713 "6.3V" 0201 1462.47,1834.9 r90 bottom
C714 "6.3V" 0201 1493.47,1834.9 r90 bottom
C715 "6.3V" 0201 1243.47,1870.9 r90 bottom
C716 "4V" 0603 1384.47,1772.9 r90 bottom
C717 "16V" 0402 509.47,1546.9 r180 bottom
C720 "6.3V" 0201 1304.47,1825.9 r90 bottom
C721 "6.3V" 0201 1273.47,1824.9 r90 bottom
C722 "6.3V" 0201 1243.47,1824.9 r90 bottom
C723 "6.3V" 0201 1587.47,1849.9 r270 bottom
C724 "6.3V" 0201 1455.47,1808.9 r270 bottom
C725 "6.3V" 0201 1335.47,1800.9 r270 bottom
C727 "6.3V" 0201 1042.47,1471.9 r180 top
C728 "6.3V" 0201 1041.47,1498.9 r180 top
C730 "6.3V" 0603 1602.47,1752.9 r270 bottom
C731 "16V" 0402 772.47,1920.9 r180 top
C746 "6.3V" 0201 1908.47,3661.9 r270 top
C761 "6.3V" 0603 589.47,664.9 r90 bottom
C763 "16V" 0402 684.47,665.9 r90 bottom
C766 "16V" 0402 326.47,3598.9 r90 top
C767 "6.3V" 0201 877.47,3850.9 r180 top
C768 "10V" 0603 484.47,3917.9 r0 bottom
C769 "10V" nonpolarity_cap_1206 1059.47,727.9 r90 top
C788 "D" D 2128.47,994.9 r90 bottom
C881 "16V" 0603 1808.47,3774.9 r180 bottom
C882 "16V" 0603 1804.47,3836.9 r180 bottom
C888 "16V" 0603 1676.47,3902.9 r180 top
C889 "16V" 0603 1672.47,4032.9 r180 top
C904 "0805" 0805 1809.47,733.9 r90 bottom
C905 "0603" 0603 1975.47,441.9 r0 top
C906 "0805" 0805 1027.47,502.9 r90 bottom
C907 "0805" 0805 1185.47,478.9 r90 top
C908 "NP 0603" 0603 2006.47,278.9 r270 top
C912 "0805" 0805 1428.47,691.9 r90 bottom
C913 "0805" 0805 1410.47,838.9 r180 bottom
C914 "0805" 0805 1212.47,723.9 r180 bottom
C930 "0603" 0603 2265.47,684.9 r270 top
C931 "0603" 0603 1981.47,727.9 r0 top
CLKOUT2 "TP test" TP#1 1831.47,3551.9 r90 top
CLKOUT5 "TP test" TP#2 1657.47,3713.9 r90 top
D1 "LED_GREEN" LED_0603 2687.47,4183.9 r0 top
D2 "LED_RED" LED_0603 220.47,2931.9 r180 top
D3 "30BQ015TR" SMLJ60S6-TP-DO214AB 2364.47,4547.9 r270 bottom
D4 "30BQ015TR" SMLJ60S6-TP-DO214AB 1995.47,4550.9 r270 bottom
D9 "MBR140SFT" MBR140SFT-SOD123 540.47,2796.9 r180 top
D10 "NSR0320" NSR0320MW2T1G-SOD323 1654.47,2488.9 r90 top
D12 "LED_RED-GRN" APB3025ESGC-F01-SMT 498.47,3800.9 r180 top
D201 "LED_RED" LED_0603 111.47,1393.9 r180 top locked
D202 "LED_GREEN" LED_0603 111.47,1900.9 r180 top locked
D203 "LED_YELLOW" LED_0603 112.47,2406.9 r180 top locked
D501 "ESD9L5.0ST5G" ESD9L5.0ST5G-SOD923 2770.47,4040.9 r270 bottom
D502 "30BQ015TR" SMLJ60S6-TP-DO214AB 2684.47,4046.9 r180 bottom
F500 "FUSE" "FUSE FAST 5A" 2429.47,4009.9 r0 top
J6 "Header 5" HDR1X5 2175.47,3030.9 r270 top
J105 "PWR2.5" KLD-0202 2786.47,4821.9 r270 top
J505 "USB AB 5 MICRO" MICRO-USB-PORT 219.47,4311.9 r270 top
J507 "SD card" SD_CARD 724.47,56.9 r180 top locked
J509 "USB AB 5 MICRO" MICRO-USB-PORT 216.47,3834.9 r270 top
J519 "UART_USB" DC3-8 924.47,4698.9 r180 top
L2 "Inductor" VLS252010T-1R0N 817.47,3378.9 r0 top
L3 "Inductor" VLS252010T-1R0N 996.47,3377.9 r180 top
L8 "Inductor" VLS252010T-1R0N 1222.47,3274.9 r270 top
L9 "Inductor" LPS5015-102MLC-SMT 486.47,3118.9 r180 top
L11 "Inductor" LPS5015-102MLC-SMT 1342.47,3079.9 r180 top
L12 "Inductor Iron" LPS4018-222MLC 717.47,2759.9 r180 top
L15 "Inductor" 0603 392.47,4378.9 r180 top
L24 "BEAD" 0603 338.47,3895.9 r180 top
L501 "120OHM" 0603 2899.47,3992.9 r270 top
L504 "magnetic bead" 0603 1405.47,3804.9 r0 bottom
L505 "magnetic bead" 0603 1269.47,3804.9 r180 bottom
L506 "120OHM" 0603 1669.47,3778.9 r180 top
L507 "magnetic bead" 0603 1539.47,3999.9 r0 top
L508 "120OHM" 0603 1348.47,3511.9 r90 bottom
L510 "120OHM" 0603 1371.47,3644.9 r270 top
L519 "Inductor" 0603 363.47,4128.9 r180 top
L520 "DLW21HN900SQ2L" DLW21HN900SQ2L-0805 408.47,4287.9 r180 top
L550 "magnetic bead" 0603 1125.47,3855.9 r0 top
L551 "magnetic bead" 0603 1123.47,3725.9 r0 top
L552 "magnetic bead" 0603 1125.47,3664.9 r0 top
L553 "magnetic bead" 0603 1126.47,3790.9 r0 top
L610 "magnetic bead" 0603 1841.47,3902.9 r0 top
L666 "magnetic bead" 0603 1832.47,4027.9 r0 top
L750 "magnetic bead" 0603 1948.47,3833.9 r0 bottom
L850 "magnetic bead" 0603 1950.47,3777.9 r0 bottom
L900 "VLCF4018T-4R7N1R0" VLCF4018-2-inductor 1248.47,859.9 r90 top
LN "TP test" via 823.47,4073.9 r180 top
LP "TP test" via 700.47,4072.9 r270 top
LS1 "Bell" PIN2 2647.47,938.9 r180 top
P100 "Header 12X2" "Double Row _DIP43025- 2P-24P" 3034.47,1849.9 r270 top
P101 "Header 12X2" "Double Row _DIP43025- 2P-24P" 3034.47,3547.9 r270 top
P_SMA1 "SMA-KE" 2.4Gantenna-IPEX 2136.47,376.9 r90 top
Q1 "IRFR9024N" IRFR/U9024N_TO-252AA 2331.47,4567.9 r180 top
Q301 "MMBT3904LT1G" MMBT3904LT1G-SOT23 175.47,1426.9 r270 bottom
Q302 "MMBT3904LT1G" MMBT3904LT1G-SOT23 155.47,1970.9 r270 bottom
Q303 "MMBT3904LT1G" MMBT3904LT1G-SOT23 161.47,2451.9 r270 bottom
Q315 "2N3904" BCY-W3/E4 2570.47,731.9 r180 top
Q504 "2N7002" 2N7002 1228.47,3851.9 r90 top
Q505 "IRLML6401" IRLML6401 1138.47,3922.9 r0 bottom
Q506 "IRLML6401" IRLML6401 1236.47,3682.9 r0 top
Q509 "IRLML6401" IRLML6401 1317.47,3682.9 r180 bottom
Q510 "2N7002" 2N7002 485.47,2903.9 r270 bottom
Q511 "IRLML6401" IRLML6401 701.47,2885.9 r270 bottom
QZ500 "32.768Khz" XTAL32.768KHZ-SMT 1966.47,2231.9 r270 bottom
R2 "0603" 0603 2127.47,3611.9 r90 bottom
R3 "0603" 0603 2517.47,3534.9 r270 top
R5 "0603" 0603 2169.47,3822.9 r90 bottom
R6 "0603" 0603 2516.47,3721.9 r270 top
R9 "0603" 0603 2053.47,4118.9 r270 bottom
R10 "22" 0603 1731.47,3712.9 r180 top
R19 "Res2" 0402 915.47,2699.9 r90 bottom
R20 "Res2" 0402 2342.47,1711.9 r90 bottom
R21 "Res2" 0805 1206.47,3190.9 r90 bottom
R25 "Res2" 0805 552.47,3279.9 r0 top
R27 "Res2" 0805 1354.47,3274.9 r270 top
R28 "Res2" 0402 1115.47,2878.9 r270 top
R29 "Res2" 0402 1175.47,2879.9 r270 top
R30 "Res2" 0201 1050.47,2915.9 r270 bottom
R31 "Res2" 0402 1051.47,2876.9 r90 top
R34 "Res2" 0402 1565.47,2753.9 r180 top
R35 "Res2" 0402 1583.47,2975.9 r0 top
R38 "Res2" 0402 1664.47,2372.9 r90 bottom
R43 "Res2" 0402 660.47,2056.9 r0 bottom
R45 "Res2" 0402 1341.47,2528.9 r90 top
R75 "DNP" 0402 1889.47,2228.9 r90 top
R85 "Res2" 0805 1102.47,2652.9 r90 top
R89 "Res2" 0402 503.47,2175.9 r180 bottom
R94 "Res2" 0402 2392.47,2611.9 r90 top
R95 "Res2" 0402 2393.47,2446.9 r90 top
R97 "Res2" 0402 2484.47,2612.9 r90 top
R98 "Res2" 0402 2485.47,2446.9 r90 top
R104 "Res2" 0402 1884.47,1865.9 r90 bottom
R105 "Res2" 0402 2576.47,2446.9 r90 top
R106 "Res2" 0402 2576.47,2613.9 r90 top
R107 "Res2" 0402 975.47,1820.9 r90 bottom
R108 "Res2" 0402 2694.47,2444.9 r90 top
R109 "Res2" 0402 2692.47,2614.9 r90 top
R125 "Res2" 0402 1237.47,2897.9 r270 top
R158 "22" 0402 1798.47,3774.9 r180 top
R169 "Res2" 0402 3130.47,2050.9 r180 top
R170 "Res2" 0402 2854.47,708.9 r270 top
R178 "Res2" 0402 2953.47,368.9 r270 top
R179 "Res2" 0402 2851.47,363.9 r270 top
R183 "Res2" 0603 1751.47,3479.9 r0 top
R189 "Res2" 0603 1751.47,3413.9 r0 top
R206 "0201" 0201 587.47,3802.9 r180 top
R207 "0201" 0201 589.47,3737.9 r180 top
R216 "Res2" 0402 2043.47,2056.9 r180 top
R304 "Res2" 0402 153.47,3186.9 r270 top
R305 "Res2" 0603 135.47,1263.9 r0 bottom
R306 "Res2" 0603 146.47,1494.9 r180 bottom
R307 "Res2" 0603 209.47,1938.9 r270 bottom
R308 "Res2" 0603 113.47,1822.9 r180 bottom
R309 "Res2" 0603 128.47,2515.9 r0 bottom
R310 "Res2" 0603 253.47,2479.9 r90 bottom
R447 "Res2" 0603 1615.47,3281.9 r0 top
R448 "Res2" 0603 1466.47,3284.9 r0 top
R501 "Res2" 0402 2413.47,4115.9 r0 top
R502 "Res2" 0402 1494.47,1185.9 r180 top
R507 "Res2" 0402 363.47,2940.9 r0 top
R511 "0603" 0603 1832.47,1003.9 r180 top
R512 "0603" 0603 1835.47,1122.9 r180 top
R513 "0603" 0603 1838.47,1258.9 r180 top
R525 "Res2" 0603 1523.47,3950.9 r270 bottom
R529 "Res2" 0603 1426.47,3930.9 r180 bottom
R541 "0402" 0402 1328.47,3944.9 r270 bottom
R542 "0402" 0402 1418.47,3992.9 r180 bottom
R544 "Res2" 0402 1624.47,822.9 r270 bottom
R545 "Res2" 0603 1267.47,3956.9 r270 bottom
R552 "Res2" 0603 1295.47,4021.9 r270 top
R554 "0402" 0402 1921.47,3505.9 r0 top
R557 "Res2" 0402 1271.47,3747.9 r0 top
R564 "Res2" 0603 1543.47,3887.9 r0 top
R568 "Res2" 0402 1022.47,4119.9 r270 top
R569 "Res2" 0402 1906.47,3653.9 r180 bottom
R573 "Res2" 0402 1906.47,3534.9 r180 bottom
R589 "Res2" 0402 643.47,2852.9 r270 bottom
R591 "Res2" 0402 903.47,2950.9 r90 bottom
R592 "Res2" 0402 384.47,2802.9 r180 bottom
R593 "Res2" 0402 2057.47,2377.9 r180 top
R599 "Res2" 0402 509.47,1606.9 r180 bottom
R600 "Res2" 0402 1128.47,2523.9 r90 top
R602 "Res2" 0402 1202.47,2229.9 r90 bottom
R605 "Res2" 0402 1793.47,2342.9 r180 bottom
R610 "DNP" 0402 1889.47,2224.9 r270 bottom
R620 "Res2" 0402 245.47,4031.9 r90 top
R625 "Res2" 0402 1588.47,1464.9 r270 bottom
R632 "Res2" 0402 379.47,2902.9 r180 bottom
R635 "Res2" 0402 530.47,2106.9 r180 bottom
R670 "Res2" 0402 684.47,549.9 r90 bottom
R674 "Res2" 0402 680.47,805.9 r270 bottom
R675 "Res2" 0402 680.47,917.9 r270 bottom
R677 "0402" 0402 386.47,3600.9 r90 top
R686 "Res2" 0402 2412.47,3287.9 r0 bottom
R687 "Res2" 0402 2412.47,3235.9 r0 bottom
R688 "Res2" 0402 2409.47,3047.9 r180 bottom
R689 "Res2" 0402 2633.47,3142.9 r180 bottom
R690 "Res2" 0402 2409.47,3004.9 r180 bottom
R691 "Res2" 0402 2406.47,2902.9 r180 bottom
R692 "Res2" 0402 2405.47,2733.9 r180 bottom
R693 "Res2" 0402 2406.47,2677.9 r180 bottom
R694 "0402" 0402 936.47,3771.9 r270 top
R695 "Res2" 0402 2632.47,3093.9 r180 bottom
R696 "Res2" 0402 2411.47,3184.9 r0 bottom
R697 "Res2" 0402 2411.47,3135.9 r0 bottom
R698 "Res2" 0402 2410.47,3090.9 r0 bottom
R699 "Res2" 0402 2287.47,2876.9 r0 top
R700 "Res2" 0402 2407.47,2954.9 r0 bottom
R701 "Res2" 0402 2405.47,2846.9 r0 bottom
R702 "Res2" 0402 2405.47,2789.9 r0 bottom
R711 "0402" 0402 475.47,3900.9 r0 top
R712 "Res2" 0603 2729.47,728.9 r270 top
R725 "Res2" 0402 1230.47,4011.9 r270 top
R727 "Res2" 0402 1884.47,1866.9 r90 top
R785 "0603" 0603 248.47,2673.9 r90 bottom
R786 "0603" 0603 257.47,1540.9 r270 bottom
R799 "Res2" 0603 2422.47,737.9 r90 top
R801 "0603" 0603 1948.47,3899.9 r0 bottom
R802 "0603" 0603 1949.47,3969.9 r0 bottom
R803 "0603" 0603 1949.47,3765.9 r0 top
R804 "0603" 0603 1950.47,3831.9 r0 top
R850 "0603" 0603 122.47,2030.9 r0 bottom
R901 "0603" 0603 2136.47,562.9 r180 top
R902 "0603" 0603 1982.47,592.9 r0 top
R903 "0603" 0603 1981.47,660.9 r0 top
R910 "0603" 0603 1538.47,962.9 r90 top
R911 "0603" 0603 1731.47,959.9 r90 top
R912 "0603" 0603 1666.47,959.9 r90 top
R913 "0603" 0603 1600.47,958.9 r90 top
R914 "0603" 0603 1469.47,964.9 r90 top
R915 "0603" 0603 1398.47,963.9 r90 top
RN "TP test" via 762.47,4073.9 r270 top
RN502 "10K" "RN_resistance -SMT8" 2480.47,3218.9 r270 bottom
RN503 "10K" "RN_resistance -SMT8" 2477.47,3008.9 r270 bottom
RP "TP test" via 632.47,4074.9 r270 top
RX "TP test" TP#1 913.47,3993.9 r0 top
SH1 "SHORT" SHORT_SH 1475.47,2530.9 r270 top
SH3V00 "SHORT" SHORT_SH 1193.47,2900.9 r270 bottom
SH3V0 "SHORT" SHORT_SH 1349.47,2891.9 r90 top
SH8 "SHORT" SHORT_SH 2131.47,1713.9 r270 bottom
SH11 "SHORT" SHORT_SH 2313.47,2010.9 r180 top
SH15 "SHORT" SHORT_SH 479.47,2702.9 r0 top
SH50 "SHORT" SHORT_SH 1495.47,1240.9 r180 top
SH100 "SHORT" SHORT_SH 2036.47,3656.9 r180 top
SH101 "SHORT" SHORT_SH 2045.47,3549.9 r180 top
SH503 "SHORT" SHORT_SH 2044.47,1988.9 r0 top
SHA7 "SHORT" SHORT_SH 1084.47,4122.9 r270 top
SHB2 "SHORT" SHORT_SH 1465.47,3168.9 r0 top
SW2 "button_sidedirction_3P" "button_sidedirction_3P 4.5X4.5" 157.47,3489.9 r270 top locked
SW3 "button_sidedirction_3P" "button_sidedirction_3P 4.5X4.5" 158.47,2719.9 r270 top locked
SW4 "button_sidedirction_3P" "button_sidedirction_3P 4.5X4.5" 154.47,1711.9 r270 top locked
SW5 "button_sidedirction_3P" "button_sidedirction_3P 4.5X4.5" 156.47,2225.9 r270 top locked
SW6 "SW DIP-8P" "dial switch -SMT DIP8" 2404.47,2785.9 r90 top locked
TP13 "TP test" TP#1 1260.47,2773.9 r90 top
TVS1 "DIODE TVS" ESD9B3.3ST5G-SOD923 359.47,4283.9 r270 bottom
TVS500 "DIODE TVS" ESD9B3.3ST5G-SOD923 2088.47,3909.9 r180 bottom
TVS501 "DIODE TVS" ESD9B3.3ST5G-SOD923 1148.47,3804.9 r0 bottom
TVS502 "DIODE TVS" ESD9B3.3ST5G-SOD923 2030.47,3494.9 r180 top
TVS503 "DIODE TVS" ESD9B3.3ST5G-SOD923 1609.47,3945.9 r90 bottom
TVS505 "DIODE TVS" ESD9B3.3ST5G-SOD923 1020.47,4099.9 r90 bottom
TX "TP test" TP#1 869.47,3691.9 r0 top
U1 "IMX6DL" IMX6DL-BGA624X25 1777.47,2383.9 r270 top locked
U1-TX "SHORT" SHORT_SH 731.47,3661.9 r180 top
U1_RX "SHORT" SHORT_SH 958.47,3884.9 r180 top
U2 "LM4871" LM4871M-SOP8 2184.47,3631.9 r0 top
U3 "MT41K128M16JT-DDR3" MT41K128M16JT-BGA96 802.47,2380.9 r270 top locked
U4 "LM4871" LM4871M-SOP8 2183.47,3830.9 r0 top
U5 "MT41K128M16JT-DDR3" MT41K128M16JT-BGA96 805.47,1850.9 r270 top locked
U6 "LTC4412" LTC4412-TSOT-23 2255.47,4155.9 r180 bottom
U7 "WM8962" WM8962-BGA49 1480.47,3599.9 r90 top
U8 "MMPF0100F0EP" MMP0100F0AEP 1078.47,2998.9 r180 top locked
U9 "LTC3025EDC#TRPBF" LTC3025 1579.47,2886.9 r180 top
U13 "MAX6897AAZT+T" MAX6897-SOT23-6 1577.47,3164.9 r0 top
U15 "NLSV1T34" NLSV1T34AM 1872.47,3646.9 r180 top
U22 "FT232RQ" FT232RQ-QFN32 513.47,3674.9 r90 bottom locked
U51 "DS1302" DS1302-DIP8 2271.47,864.9 r180 top
U501 "ADMP421BCEZ-RL7" ADMP421B-LGA_CAV 3051.59,3940.43 r90 top
U507 "NC7SP125P5X" NC7SP125P5X 946.47,2668.9 r90 top
U510 "NC7WZ17" NC7WZ17-SC70-6 1737.47,3601.9 r0 bottom
U512A "MTFC8GLCDM" SDIN8DE2-4G-EMMC-BGA153 2114.47,1581.9 r90 top
U519 "SN74LVC2G126" SN74LVC2G126-SSOP8 702.47,3809.9 r0 top
U521 "ADMP421BCEZ-RL7" ADMP421B-LGA_CAV 3050.59,3750.43 r90 top
U901 "AP6212" AP6212-LCC44 1810.47,407.9 r180 top locked
U902 "XC6219B182MR" XC6219B182MR-SOT-25 1033.47,534.9 r270 top
X900 "32.758K OSC" "32.768K OSC" 1176.47,648.9 r0 top
Y1 "24Mhz" XTL571300LLI24.000-10TR 1985.47,2190.9 r0 top
Y51 "32.768K" BCY-W2/D3.1 2417.47,1097.9 r0 top
Y100 "24Mhz" XTL571300LLI24.000-10TR 2181.47,635.9 r90 top

## Footprints (in the part's own frame and the unit in brackets; to place one, negate y for a bottom-side part, rotate by r counter-clockwise, add the part's x,y. Pads: shape width x height; smd on the part's side, far side on the other; paste and mask are expansions set on the pad)
2.4Gantenna-IPEX [mil]
  rect 41.33x86 smd: 1(0,0) 1(116,0)
  oval 40x80 smd: 2(58,-40)
  silkscreen extent -40,-60 155,60
2N7002 [mil]
  rect 30x48 smd: 1(80,0) 2(0,0) 3(40,-86)
  silkscreen extent -5,-90 85,0
"32.768K OSC" [mil]
  rect 55.11x47.24 smd: 1(0,0) 2(86.6,0) 3(86.6,70) 4(0,70)
  silkscreen extent -45,-35 130,105
0201 [mil]
  rect 12x12 smd: 1(0,0) 2(20,0)
0402 [mm] "Chip Capacitor; Body 1.0 x 0.5 mm (LxW typ)"
  rect 0.9x0.7 smd: 1(-0.65,0) 2(0.65,0)
  silkscreen extent -1.4,-0.64 1.4,0.64
0603 [mm] "Chip Capacitor; Body 1.6 x 0.8 mm (LxW typ)"
  rect 1.1x1 smd: 1(-0.85,0) 2(0.85,0)
  silkscreen extent -1.65,-0.76 1.65,0.76
0805 [mm] "Chip Capacitor; Body 2.0 x 1.2 mm (LxW typ)"
  rect 1.3x1.5 smd: 1(-0.95,0) 2(0.95,0)
  silkscreen extent -1.91,-1.02 1.91,1.02
ADMP421B-LGA_CAV [mil]
  rect 24x16 smd: 1(0,0) 2(0,-28) 4(36,-28) 5(36,0)
  Top Layer circle w20: c19,-98 r27
  silkscreen extent -30,-150 70,30
AP6212-LCC44 [mil]
  rect 47.24x19.68 smd: 1(0,0) 2(0,-35.43) 3(0,-70.86) 4(0,-106.29) 5(0,-141.72) 6(0,-177.15) 7(0,-212.58) 8(0,-248.01) 9(0,-283.44) 10(0,-318.87) 11(0,-354.3) 23(447.8,-354.3) 24(447.8,-318.87) 25(447.8,-283.44) 26(447.8,-248.01) 27(447.8,-212.58) 28(447.8,-177.15) 29(447.8,-141.72) 30(447.8,-106.29) 31(447.8,-70.86) 32(447.8,-35.43) 33(447.8,0)
  rect 19.68x47.24 smd: 12(46.75,-401.05) 13(82.18,-401.05) 14(117.61,-401.05) 15(153.04,-401.05) 16(188.47,-401.05) 17(223.9,-401.05) 18(259.33,-401.05) 19(294.76,-401.05) 20(330.19,-401.05) 21(365.62,-401.05) 22(401.05,-401.05) 34(401.05,46.75) 35(365.62,46.75) 36(330.19,46.75) 37(294.76,46.75) 38(259.33,46.75) 39(223.9,46.75) 40(188.47,46.75) 41(153.04,46.75) 42(117.61,46.75) 43(82.18,46.75) 44(46.75,46.75)
  round 11.81 smd: 45(118,-36) 46(188,-36) 47(279,-36)
  silkscreen extent -19,-420 466,65
APB3025ESGC-F01-SMT [mil]
  rect 67x44 smd: 1(0,0) 2(106.3,0) 3(0,66.92) 4(106.3,66.92)
  silkscreen extent -45,-55 145,120
BCY-W2/D3.1 [mm] "Crystal, Thru-Hole; 2 Leads; Body 3.1 x 8.2 mm (Dia.xH)"
  round 1.3 hole 0.7: 1(0,1.55) 2(0,-1.55)
  silkscreen extent -1.55,-1.19 1.55,1.17
BCY-W3/E4 [mm] "TO, Flat Index; 3 In-Line, Axial Leads; Body Dia. 4.5mm; Leads 0.51 x 0.48 mm (max)"
  oval 2x1 hole 0.9: 1(0,-1.27) 2(0,0) 3(0,1.27)
  silkscreen extent -2.48,-2.48 1.5,2.48
"button_sidedirction_3P 4.5X4.5" [mil]
  round 70 hole 40: 1(0,0) 2(118,0) 3(60,-70)
  silkscreen extent -50,-120 170,50
D [mm] "Capacitor, SM Tantalum; Body 7.3 x 4.3 mm (LxW typ)"
  rect 2.6x2.4 smd: 1(-3.2,0) 2(3.2,0)
  silkscreen extent -5.08,-2.3 3.8,2.54
DC3-8 [mil]
  round 70 hole 40: 1(0,0) 2(100,0) 3(200,0) 4(300,0) 5(300,100) 6(200,100) 7(100,100) 8(0,100)
  silkscreen extent -200,-50 500,150
"dial switch -SMT DIP8" [mil]
  rect 30x50 smd: 1(405.2,20) 2(355.2,20) 3(305.2,20) 4(255.2,20) 5(204.8,20) 6(154.8,20) 7(104.8,20) 8(54.8,20) 9(54.8,-280) 10(104.8,-280) 11(154.8,-280) 12(204.8,-280) 13(255.2,-280) 14(305.2,-280) 15(355.2,-280) 16(405.2,-280)
  silkscreen extent 1,-259 587,-1
DLW21HN900SQ2L-0805 [mil]
  rect 36x16 smd: 1(0,0) 2(66.92,0) 3(66.92,31.5) 4(0,31.5)
  silkscreen extent -25,-25 95,50
"Double Row _DIP43025- 2P-24P" [mil]
  round 100 hole 70: 1(0,0) 2(0,118.11) 3(118.11,0) 4(118.11,118.11) 5(236.22,0) 6(236.22,118.11) 7(354.33,0) 8(354.33,118.11) 9(472.44,0) 10(472.44,118.11) 11(590.55,0) 12(590.55,118.11) 13(708.66,0) 14(708.66,118.11) 15(826.77,0) 16(826.77,118.11) 17(944.88,0) 18(944.88,118.11) 19(1062.99,0) 20(1062.99,118.11) 21(1181.1,0) 22(1181.1,118.11) 23(1299.21,0) 24(1299.21,118.11)
  silkscreen extent -118,-120 1417,236
DS1302-DIP8 [mil]
  round 60 hole 39.37: 1(0,0) 2(0,-100) 3(0,-200) 4(0,-300) 5(300,-300) 6(300,-200) 7(300,-100) 8(300,0)
  silkscreen extent -50,-350 350,50
ESD9B3.3ST5G-SOD923 [mil]
  rect 12x16 smd: 1(0,0) 2(35.43,0)
  silkscreen extent -15,-15 50,15
ESD9L5.0ST5G-SOD923 [mil]
  rect 12x16 smd: 1(0,0) 2(35.44,0)
  silkscreen extent -6,-20 55,20
FT232RQ-QFN32 [mil]
  oval 30x11 smd: 1(0,0) 2(0,-19.7) 3(0,-39.4) 4(0,-59.1) 5(0,-78.8) 6(0,-98.5) 7(0,-118.2) 8(0,-137.9) 17(182.7,-137.9) 18(182.7,-118.2) 19(182.7,-98.5) 20(182.7,-78.8) 21(182.7,-59.1) 22(182.7,-39.4) 23(182.7,-19.7) 24(182.7,0)
  oval 11x30 smd: 9(22.4,-160.3) 10(42.1,-160.3) 11(61.8,-160.3) 12(81.5,-160.3) 13(101.2,-160.3) 14(120.9,-160.3) 15(140.6,-160.3) 16(160.3,-160.3) 25(160.3,22.4) 26(140.6,22.4) 27(120.9,22.4) 28(101.2,22.4) 29(81.5,22.4) 30(61.8,22.4) 31(42.1,22.4) 32(22.4,22.4)
  rect 34.7x34.7 smd: 33(91.35,-68.95)
  silkscreen extent -29,-189 211,51
"FUSE FAST 5A" [mm]
  rect 1x1.8 smd: 1(0,0) 2(2.5,0)
  silkscreen extent -0.77,-1.18 3.27,1.18
HDR1X5 [mm] "Connector; Header; 5 Position"
  rect 1.5x1.5 hole 0.9: 1(0,0)
  round 1.5 hole 0.9: 2(2.54,0) 3(5.08,0) 4(7.62,0) 5(10.16,0)
  silkscreen extent -1.27,-1.27 11.43,1.27